# Altium PCB UTAT_data handling_v1.pc.PcbDoc (part 1 of 3)
Units mm, origin at the board's own origin, x right, y up, seen from the top; angles counter-clockwise.
Board outline 152.4 x 101.6 mm, 4 copper layers (Top Layer, +3V3, GND, Bottom Layer); 168 components, 207 nets, 753 pads, 464 vias.
Unrouted connection lines stored in the file: 1.
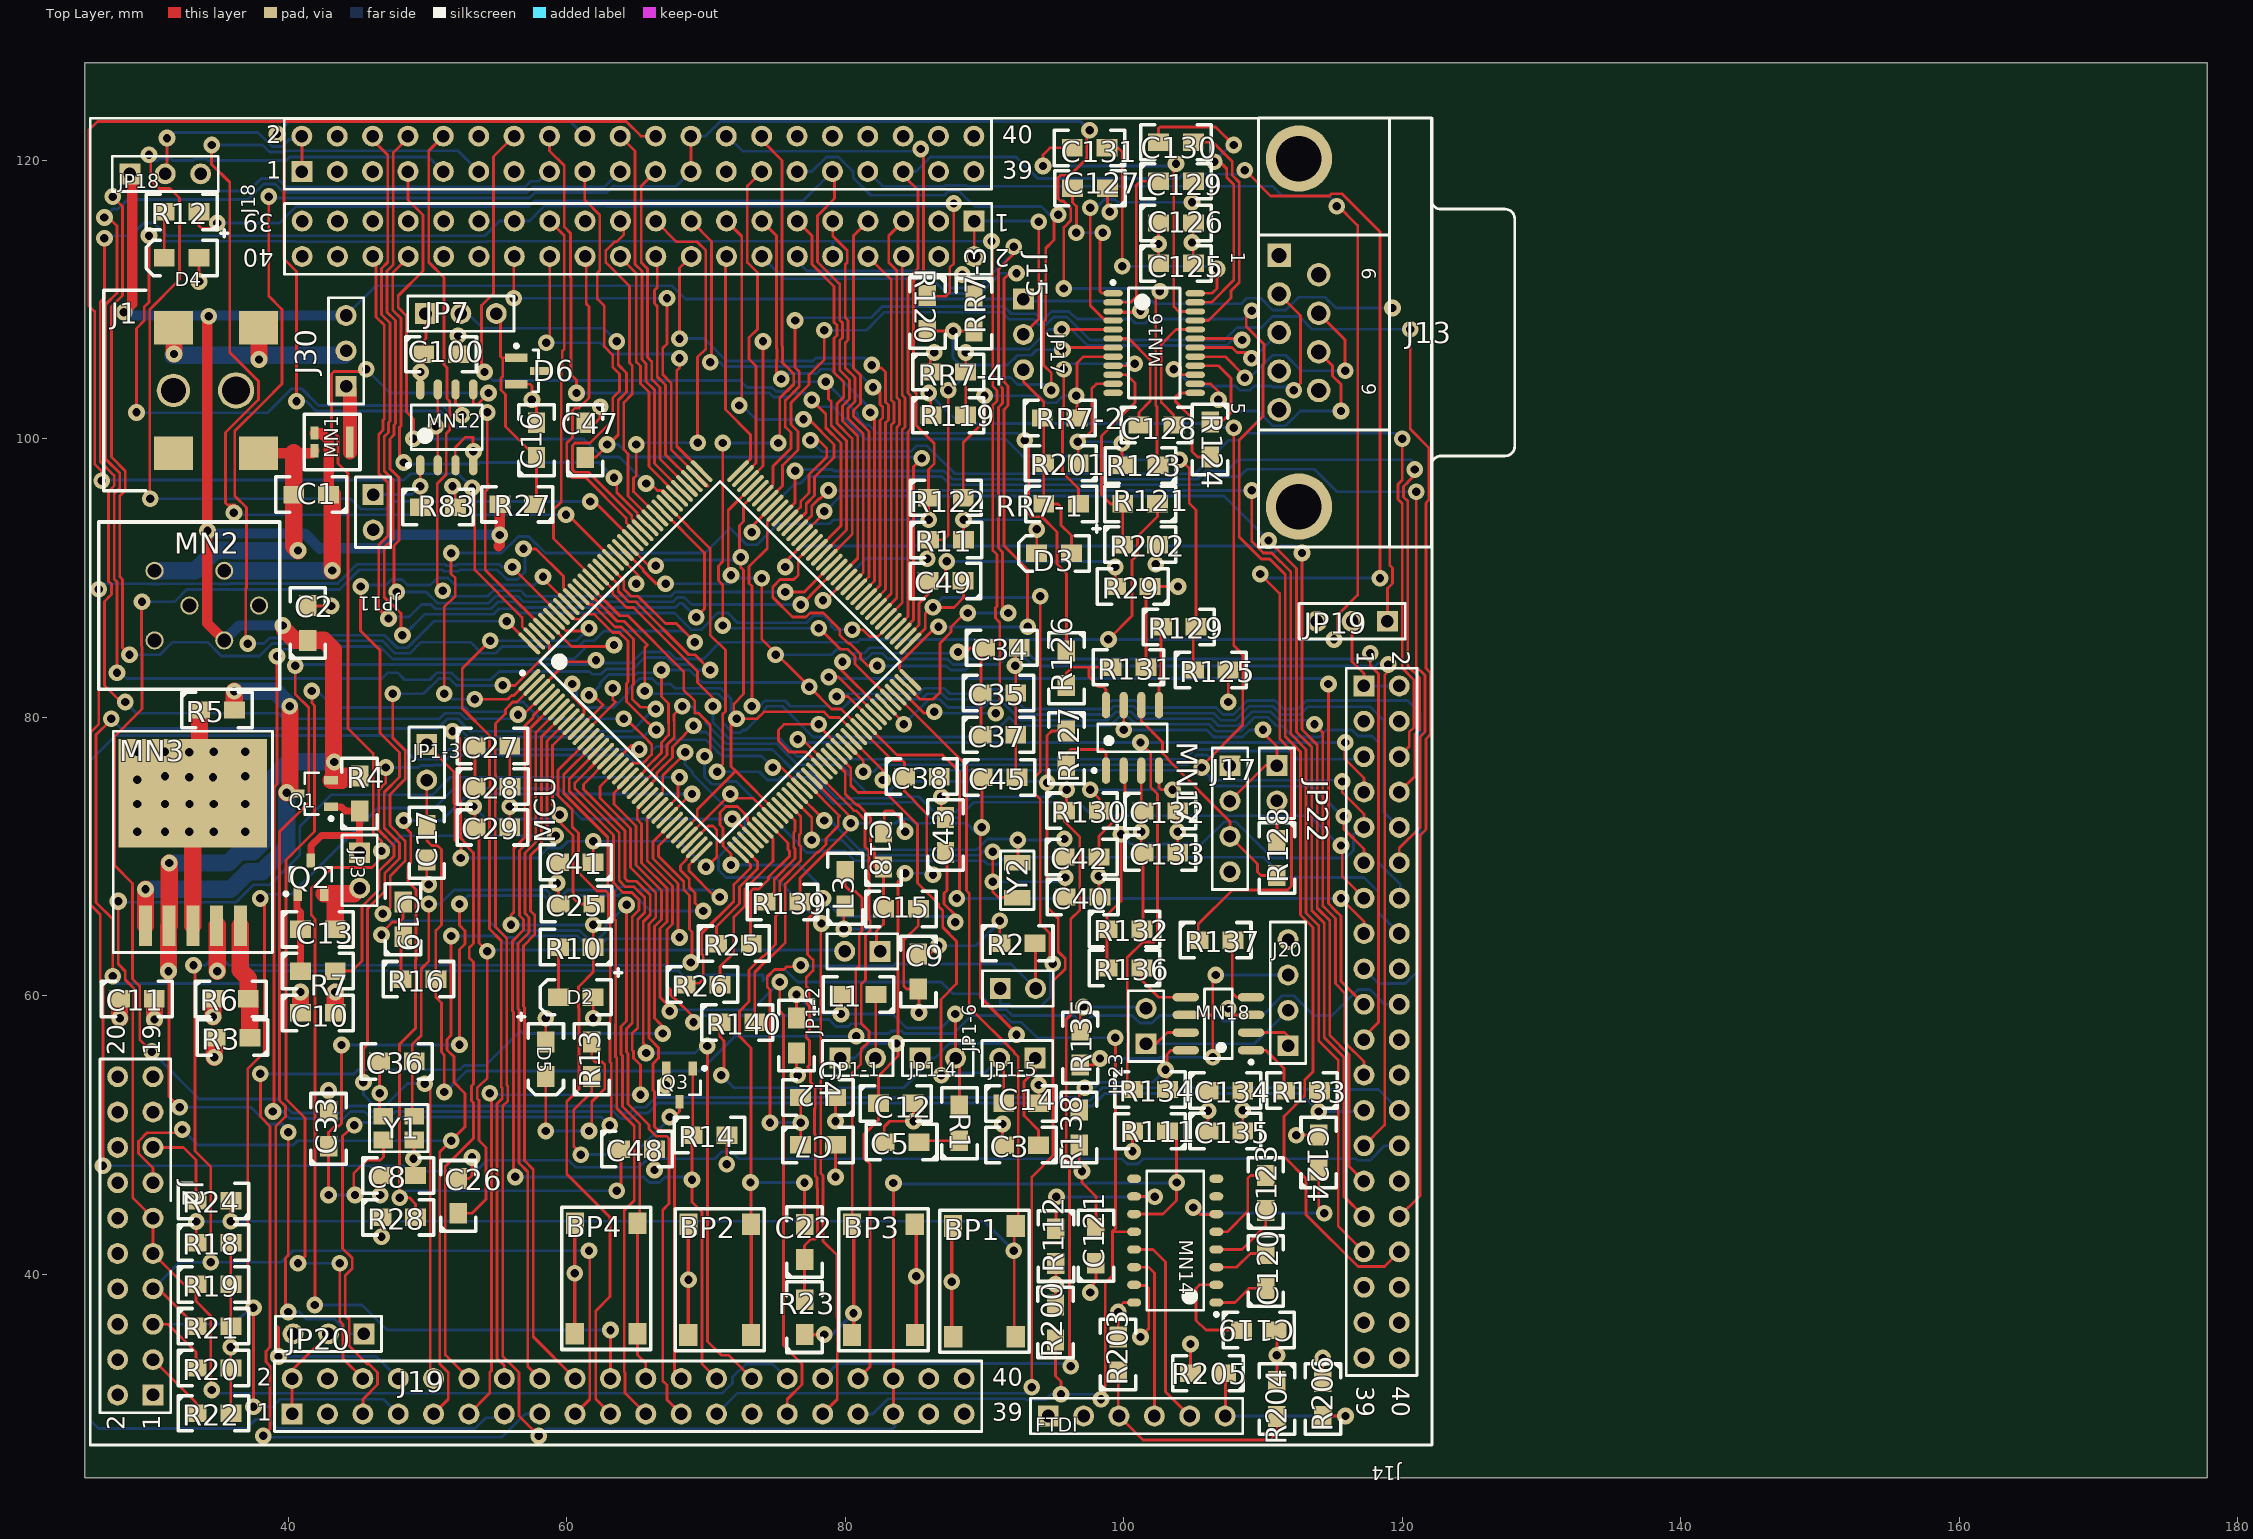
[diagram p0: Top Layer view]
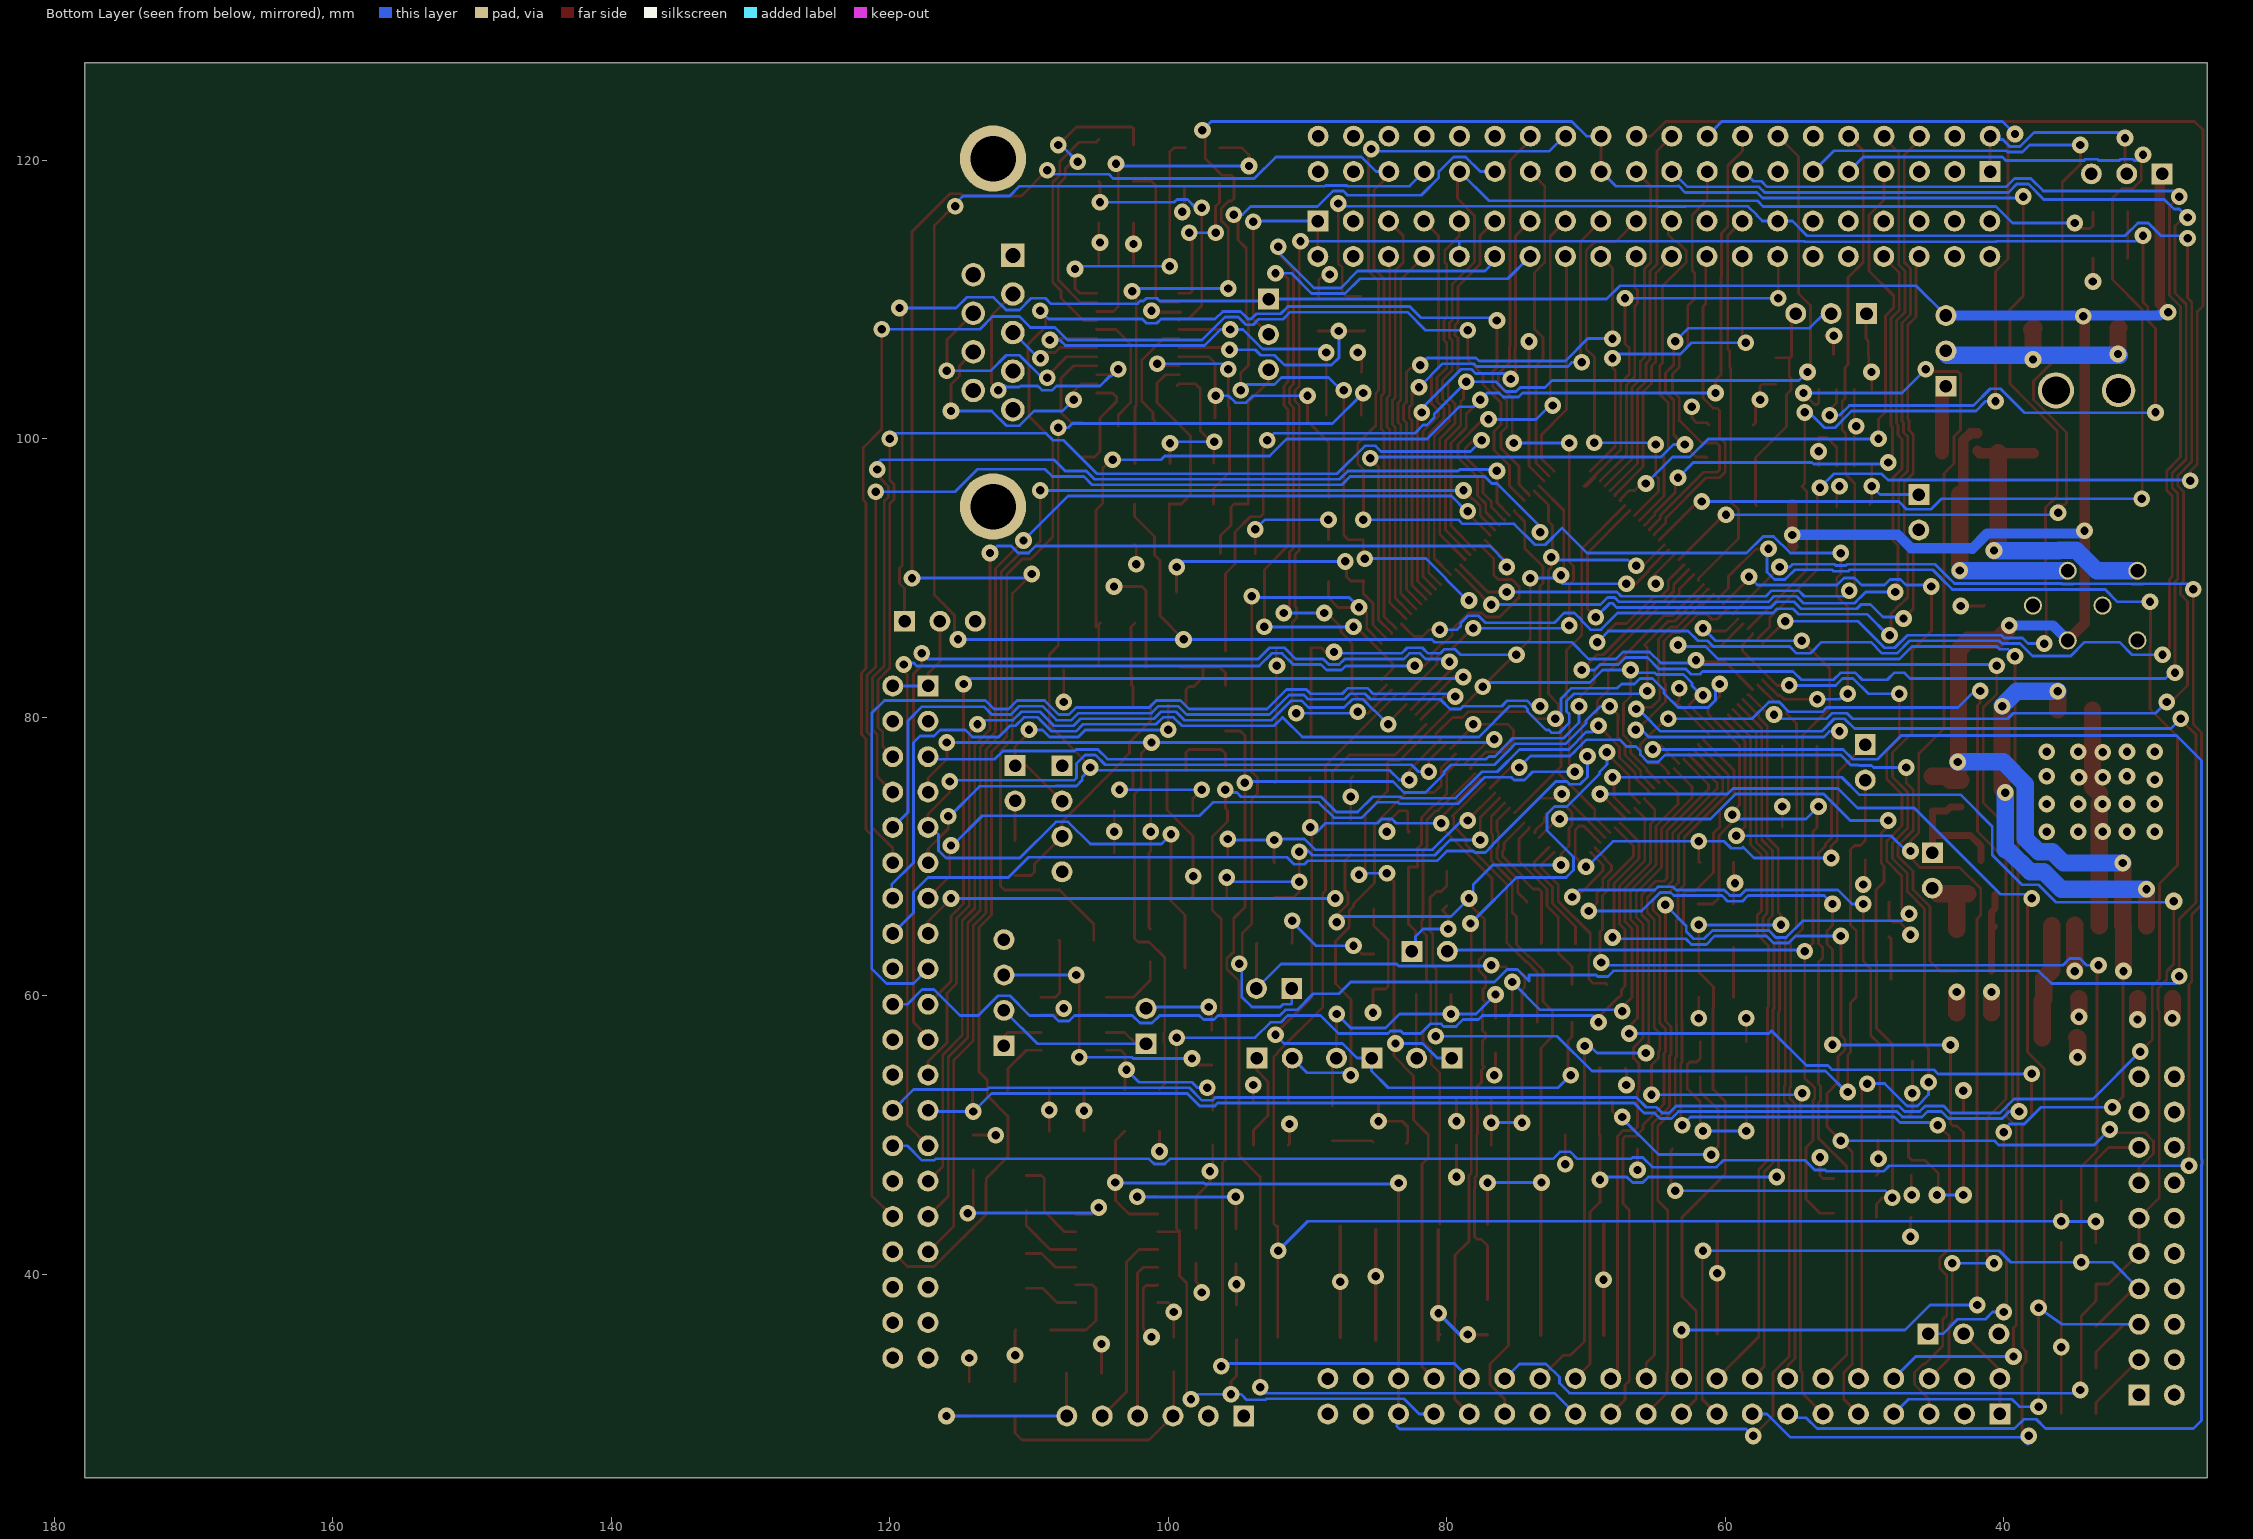
[diagram p1: Bottom Layer view, seen from below]
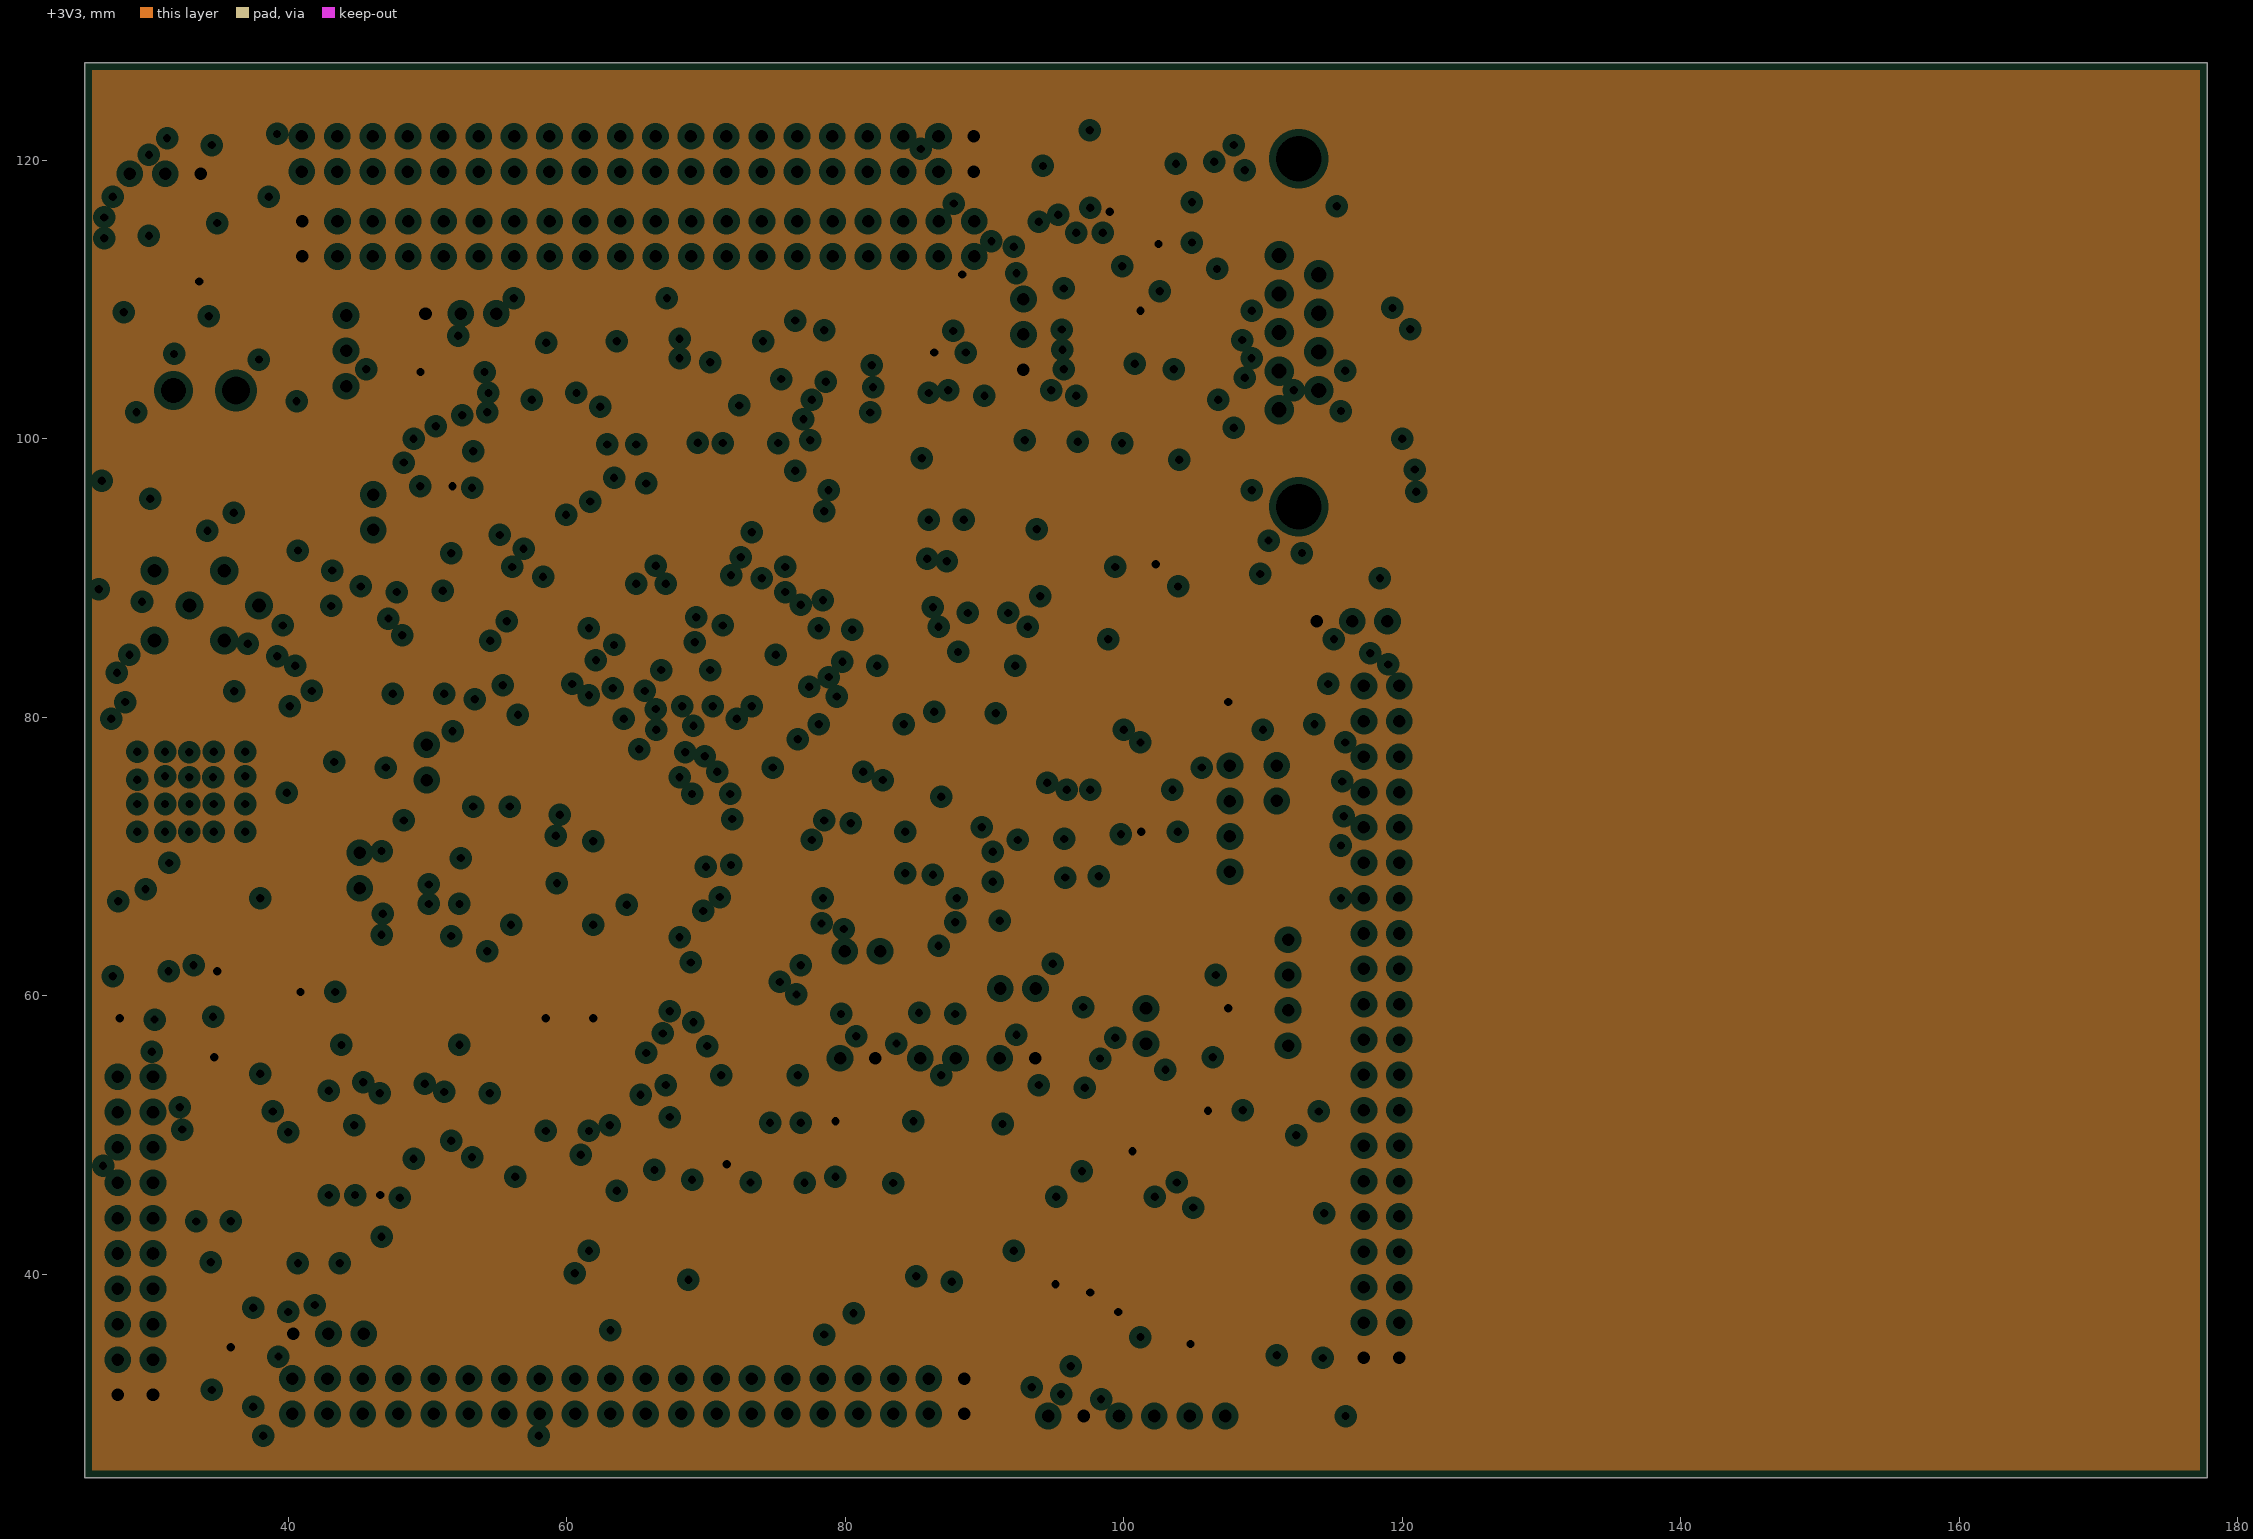
[diagram p2: +3V3, clearances drawn from the general rule]
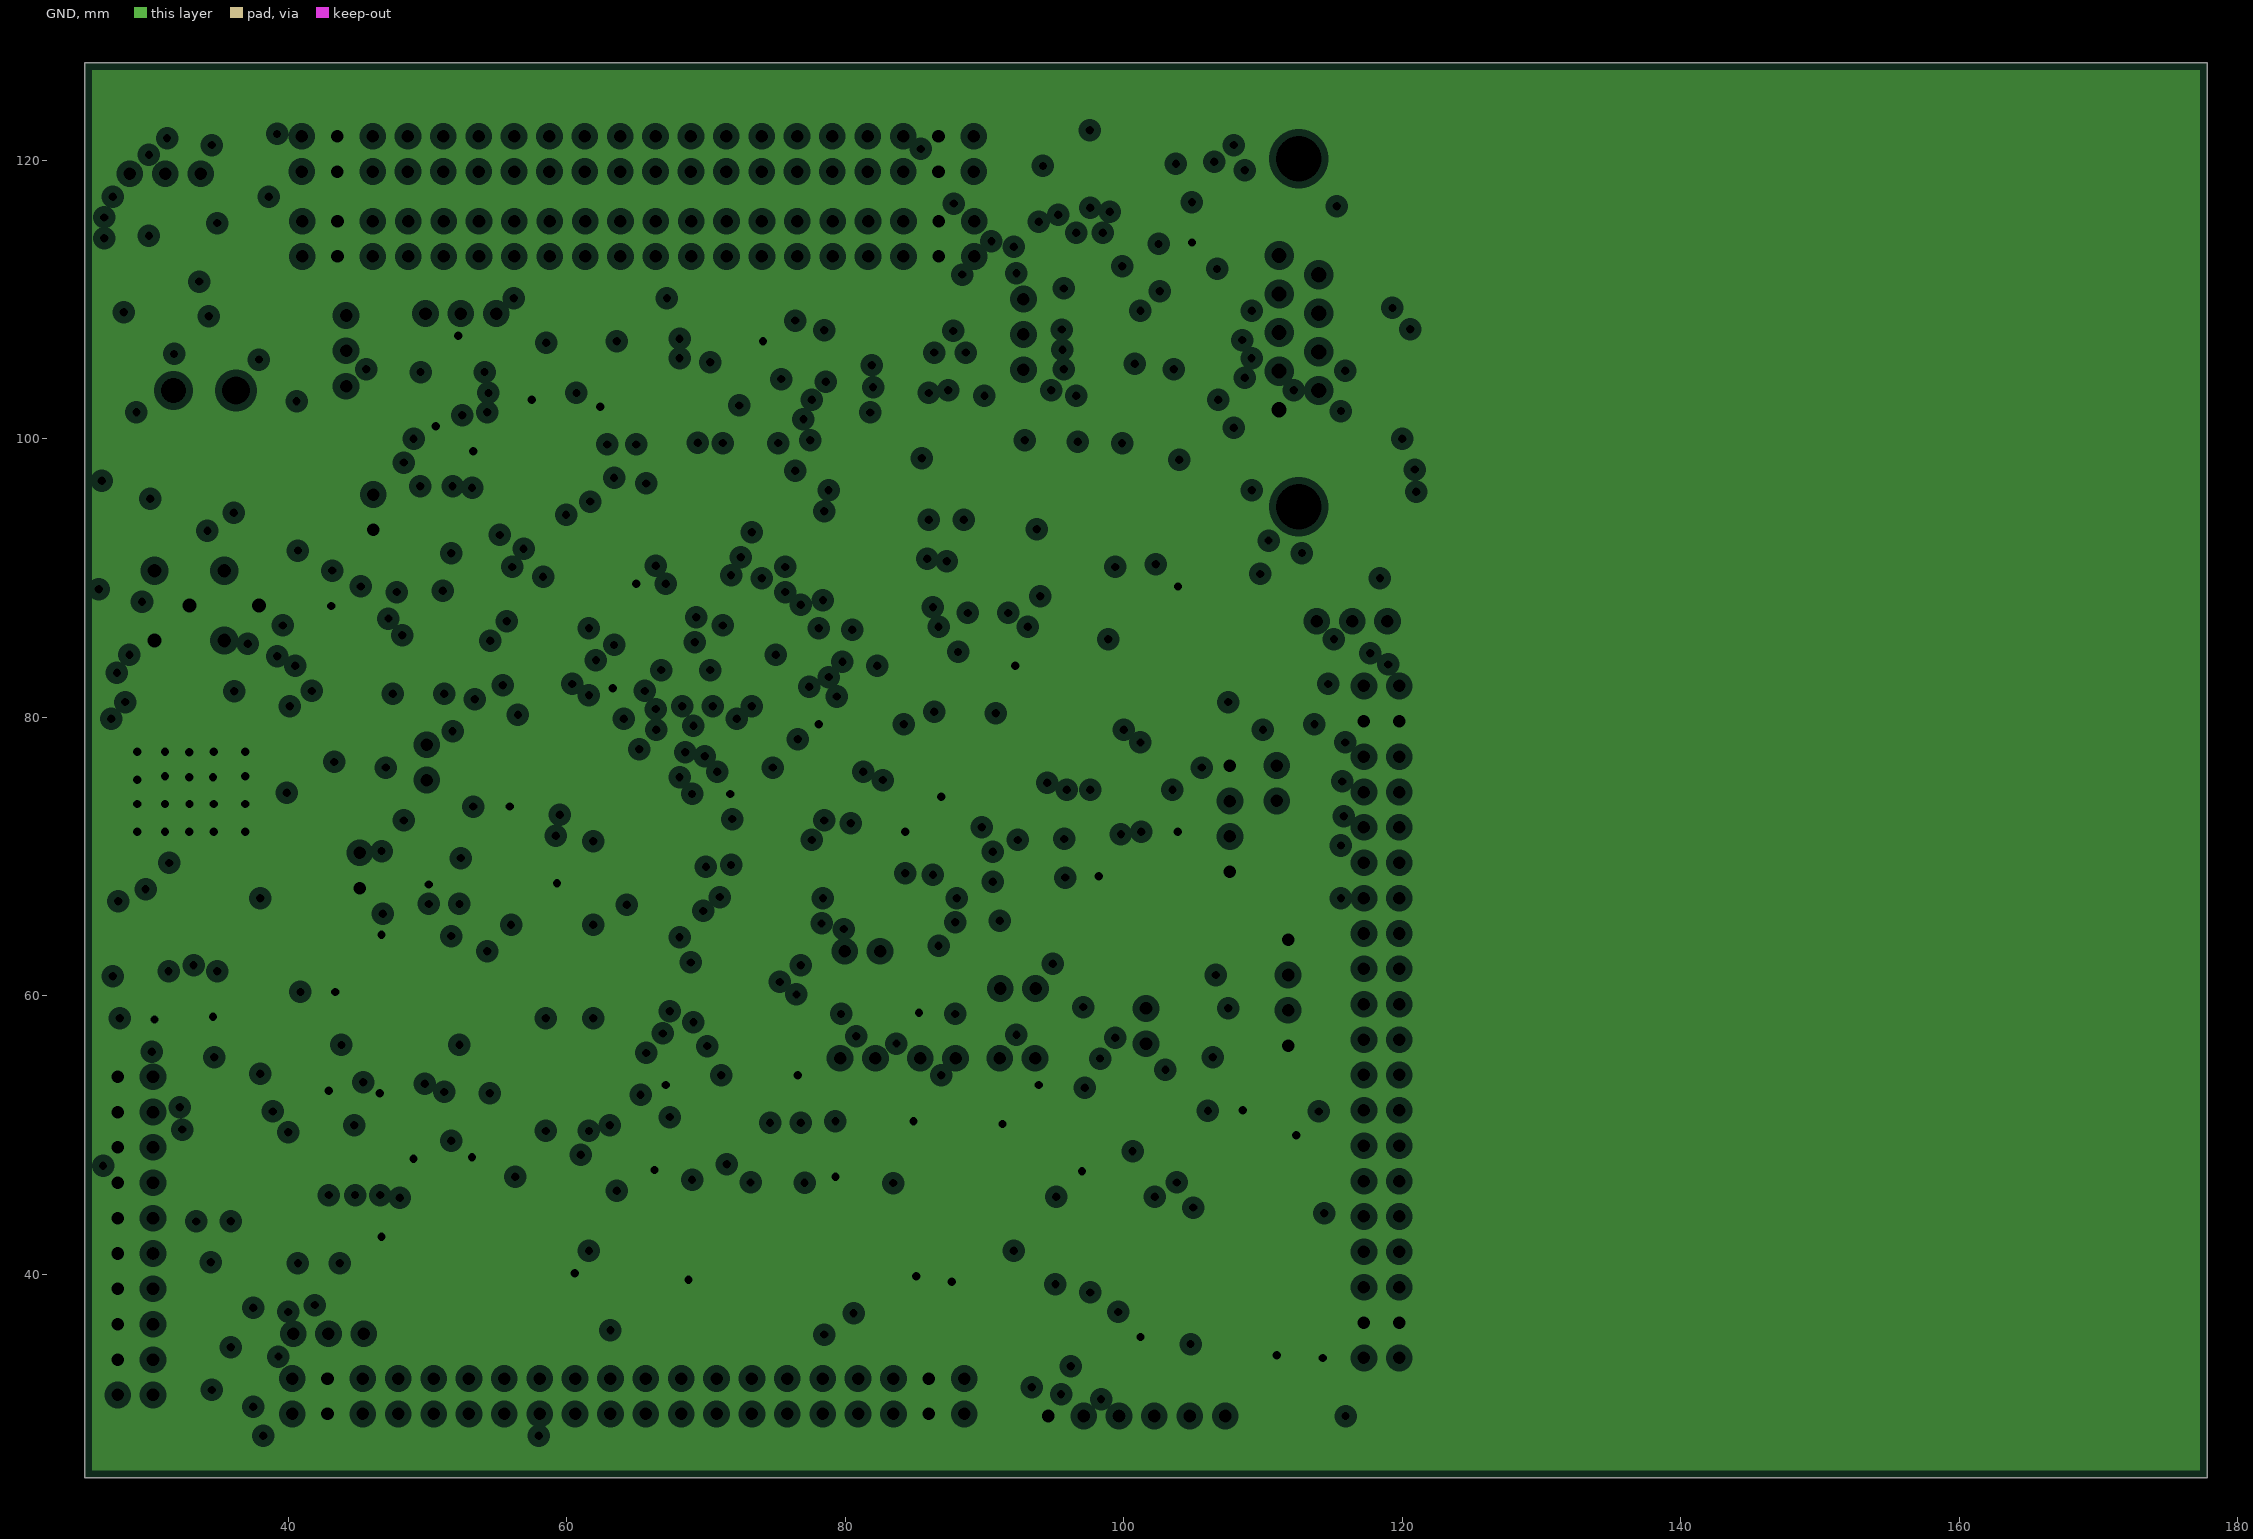
[diagram p3: GND, clearances drawn from the general rule]

## Layer stack, top to bottom
Top Solder: solder mask 0.0102, Solder Resist, Dk 3.5
Top Layer: signal copper 0.0356
Dielectric 1: dielectric 0.32, FR-4, Dk 4.8
+3V3: plane copper 0.0356, net +3V3
Dielectric2: dielectric 0.32, FR-4, Dk 4.8
GND: plane copper 0.0356, net GND
Dielectric3: dielectric 0.32, FR-4, Dk 4.8
Bottom Layer: signal copper 0.0356
Bottom Solder: solder mask 0.0102, Solder Resist, Dk 3.5

## Board outline
25.4,25.4 177.8,25.4 177.8,127 25.4,127

## Design rules (kind name [scope] priority, off if disabled: settings)
Clearance [All] p1: gap=0.2
PlaneClearance [All] p1: clearance=0.508
PlaneConnect [All] p1: planeconnectstyle=Relief reliefexpansion=0.508 reliefentries=4 reliefconductorwidth=0.254 reliefairgap=0.254
PolygonConnect [All] p1: connectstyle=Relief reliefconductorwidth=0.254 reliefentries=4 polygonreliefangle="90 Angle" airgapwidth=0.254
RoutingVias [All] p1: holewidth=0.6 width=1.2 viastyle="Through Hole" minholewidth=0.6 minwidth=1.2 maxholewidth=0.6 maxwidth=1.2
SolderMaskExpansion [All] p1: expansion=0.102
Width [All] p1: maxlimit=1.25 minlimit=0.2 preferedwidth=1.25
28 further rules are at their usual default settings.

## Classes and differential pairs
component class "U_Other Components": BP1 BP2 BP3 BP4 C1 C2 C3 C4 C5 C7 C8 C9 C10 C11 C12 C13 C14 C15 C17 C18 C19 C22 C100 C119 C120 C121 C123 C124 C125 C126 C127 C128 C129 C130 C131 D2 D3 D4 D5 FTDI J1 J13 J14 J15 J18 J19 J30 JP1-1 JP1-2 JP1-3 JP1-4 JP1-5 JP1-6 JP3 JP11 JP17 JP18 JP19 JP20 L1 L2 L3 MN1 MN2 MN3 MN12 MN14 MN16 Q1 Q2 Q3 R1 R2 R3 R4 R5 R6 R7 R10 R11 R12 R13 R14 R16 R23 R83 R111 R112 R119 R120 R121 R122 R123 R124 R200 R201 R202 R203 R204 R205 R206 RR7-1 RR7-2 RR7-3 RR7-4
component class "U_MCU et al": C25 C26 C27 C28 C29 C33 C34 C35 C36 C37 C38 C40 C41 C42 C43 C45 C47 C48 C49 C132 C133 C134 C135 D6 J2 J17 J20 JP7 JP22 JP23 MCU MN17 MN18 R18 R19 R20 R21 R22 R24 R25 R26 R27 R28 R29 R125 R126 R127 R128 R129 R130 R131 R132 R133 R134 R135 R136 R137 R138 R139 R140 Y1 Y2
net class PD[0..10]: PD0 PD1 PD2 PD3 PD4 PD5 PD6 PD7 PD8 PD9 PD10
net class PC[0..30]: PC0 PC1 PC2 PC3 PC4 PC5 PC6 PC7 PC8 PC9 PC10 PC11 PC12 PC13 PC14 PC15 PC16 PC17 PC18 PC19 PC20 PC21 PC22 PC23 PC24 PC25 PC26 PC27 PC28 PC29 PC30
net class PB[0..31]: PB0 PB1 PB2 PB3 PB4 PB5 PB6 PB7 PB8 PB9 PB10 PB11 PB12 PB13 PB14 PB15 PB16 PB17 PB18 PB19 PB20 PB21 PB22 PB23 PB24 PB25 PB26 PB27 PB28 PB29 PB30 PB31
net class PA[0..29]: PA0 PA1 PA2 PA3 PA4 PA5 PA6 PA7 PA8 PA9 PA10 PA11 PA12 PA13 PA14 PA15 PA16 PA17 PA18 PA19 PA20 PA21 PA22 PA23 PA24 PA25 PA26 PA27 PA28 PA29

## Components (designator, comment, footprint, x,y, rotation, side; value= is the part's Value field where it differs from the comment)
BP1 "PTS645" PTS645 90,39.5 r90 top
BP2 "PTS645" PTS645 70.994,39.62 r90 top
BP3 "PTS645" PTS645 82.748,39.62 r270 top
BP4 "PTS645" PTS645 62.831,39.705 r90 top
C1 "Cap Pol3" "0805 Cap" 41.65,96 r0 top
C2 "Cap Pol3" "0805 Cap" 41.406,86.78 r270 top
C3 "Cap Pol3" "0805 Cap" 92.631,49.28 r0 top
C4 "Cap Pol3" "0805 Cap" 76.5,57.15 r90 top
C5 "Cap Pol3" "0805 Cap" 84.05,49.5 r0 top
C7 "Cap Pol3" "0805 Cap" 78.05,49.3 r180 top
C8 "Cap Pol3" "0805 Cap" 47.9,47.1 r180 top
C9 "Cap Pol3" "0805 Cap" 85.25,61.75 r90 top
C10 "Cap Pol3" "0805 Cap" 42.131,58.78 r180 top
C11 "Cap Pol3" "0805 Cap" 29.131,59.78 r180 top
C12 "Cap Pol3" "0805 Cap" 83.631,52.28 r180 top
C13 "Cap Pol3" "0805 Cap" 42.131,64.78 r180 top
C14 "Cap Pol3" "0805 Cap" 92.631,52.28 r180 top
C15 "Cap Pol3" "0805 Cap" 84,66.25 r180 top
C16 "Cap Pol3" "0805 Cap" 57.831,99.905 r270 top
C17 "Cap Pol3" "0805 Cap" 49.95,71 r90 top
C18 "Cap Pol3" "0805 Cap" 82.75,70.5 r270 top
C19 "Cap Pol3" "0805 Cap" 48.25,65.5 r270 top
C22 "Cap Pol3" "0805 Cap" 77.081,42.33 r270 top
C25 "Cap Pol3" "0805 Cap" 60.7,66.6 r0 top
C26 "Cap Pol3" "0805 Cap" 52.209,45.638 r270 top
C27 "Cap Pol3" "0805 Cap" 54.663,77.947 r180 top
C28 "Cap Pol3" "0805 Cap" 54.683,75.026 r180 top
C29 "Cap Pol3" "0805 Cap" 54.663,72.105 r180 top
C33 "0805 Cap" "0805 Cap" 42.9,50.45 r270 top
C34 "Cap Pol3" "0805 Cap" 91.25,85 r180 top
C35 "Cap Pol3" "0805 Cap" 91,81.75 r180 top
C36 "0805 Cap" "0805 Cap" 47.8,55.3 r0 top
C37 "Cap Pol3" "0805 Cap" 91,78.75 r180 top
C38 "Cap Pol3" "0805 Cap" 85.5,75.75 r180 top
C40 "0805 Cap" "0805 Cap" 97.05,67.1 r180 top
C41 "Cap Pol3" "0805 Cap" 60.65,69.6 r0 top
C42 "0805 Cap" "0805 Cap" 96.981,69.972 r180 top
C43 "Cap Pol3" "0805 Cap" 87.2,71.55 r270 top
C45 "Cap Pol3" "0805 Cap" 91.082,75.692 r180 top
C47 "Cap Pol3" "0805 Cap" 61.331,99.905 r270 top
C48 "Cap Pol3" "0805 Cap" 65.05,49 r180 top
C49 "Cap Pol3" "0805 Cap" 87.2,89.8 r0 top
C100 "Cap Pol3" "0805 Cap" 50.981,106.08 r180 top
C119 "Cap Pol3" "0805 Cap" 109.7,36 r180 top
C120 "Cap Pol3" "0805 Cap" 110.2,40.25 r270 top
C121 "Cap Pol3" "0805 Cap" 98,42.05 r270 top
C123 "Cap Pol3" "0805 Cap" 110.2,45.85 r270 top
C124 "Cap Pol3" "0805 Cap" 114,48.75 r270 top
C125 "Cap Pol3" "0805 Cap" 103.75,112.6 r180 top
C126 "Cap Pol3" "0805 Cap" 103.75,115.5 r180 top
C127 "Cap Pol3" "0805 Cap" 97.581,118 r0 top
C128 "Cap Pol3" "0805 Cap" 102.35,101 r180 top
C129 "Cap Pol3" "0805 Cap" 103.75,118.5 r180 top
C130 "Cap Pol3" "0805 Cap" 103.75,121.3 r0 top
C131 "Cap Pol3" "0805 Cap" 97.55,120.9 r0 top
C132 "Cap Pol3" "0805 Cap" 102.631,73.28 r180 top
C133 "Cap Pol3" "0805 Cap" 102.631,70.28 r180 top
C134 "Cap Pol3" "0805 Cap" 107.3,53.2 r180 top
C135 "Cap Pol3" "0805 Cap" 107.3,50.3 r180 top
D2 "Blue" "0805 LED" 60.65,59.9 r0 top
D3 "Amber" "0805 LED" 94.999,91.774 r0 top
D4 "Green" "0805 LED" 32.35,113 r0 top
D5 "Red" "0805 LED" 58.5,55.45 r90 top
D6 "LM4040A30IDBZR" TI-DBZ3_N 57.281,104.88 r0 top
FTDI "Header 6" HDR1X6 94.581,29.83 r0 top
J1 "MP179P 2.1mm" "2.1mm Jack" 31.756,103.48 r0 top
J2 "Header 10X2" "HDR2X10 (JTAG)" 30.29,31.34 r90 top
J13 "D Connector 9" DSUB1.385-2H9 122.08,107.635 r270 top
J14 "Header 20X2" HDR2X20 117.25,82.26 r270 top
J15 "Header 20X2" HDR2X20 89.26,115.64 r180 top
J17 "Header 4" HDR1X4 107.631,76.53 r270 top
J18 "Header 20X2" HDR2X20 40.98,119.2 r0 top
J19 "Header 20X2" HDR2X20 40.281,29.98 r0 top
J20 "Header 4" HDR1X4 111.8,56.42 r90 top
J30 "Header 3 (Bypass)" HDR1X3 44.156,103.78 r90 top
JP1-1 "Header 2" HDR1X2 79.631,55.53 r0 top
JP1-2 "Header 2" HDR1X2 82.5,63.2 r180 top
JP1-3 "Header 2" HDR1X2 49.95,78.04 r270 top
JP1-4 "Header 2" HDR1X2 85.381,55.53 r0 top
JP1-5 "Header 2" HDR1X2 93.631,55.53 r180 top
JP1-6 "Header 2" HDR1X2 91.131,60.53 r0 top
JP3 "Header 2" HDR1X2 45.131,70.28 r270 top
JP7 "Header 3" HDR1X3 49.86,109 r0 top
JP11 "Header 2" HDR1X2 46.1,96 r270 top
JP17 "Header 3" HDR1X3 92.8,110.04 r270 top
JP18 "Header 3" HDR1X3 28.631,119.03 r0 top
JP19 "Header 3" HDR1X3 118.94,86.9 r180 top
JP20 "Header 3" HDR1X3 45.431,35.73 r180 top
JP22 "Header 2" HDR1X2 111,76.54 r270 top
JP23 "Header 2" HDR1X2 101.6,56.56 r90 top
L1 "Inductor" "0805 Resistor" 80.95,60.1 r0 top
L2 "Inductor" "0805 Resistor" 78.05,52.7 r0 top
L3 "Inductor" "0805 Resistor" 80,67.7 r270 top
MCU "ATSAM3X8EA-AU" LQFP144_M 71,84 r45 top
MN1 "ZEN056V130A" ZEN056V130A24L 43.156,99.78 r180 top
MN2 "BNX002-01" BNX002 32.906,88.03 r0 top
MN3 "MIC29152WU" MIC29152WU 33.156,65.03 r0 top
MN12 "AT24C512C" AT24C512C 51.381,100.83 r90 top
MN14 "MAX3232CSE" SOIC127P570X175-16N 103.7,42.425 r180 top
MN16 "ADM3312EARU" TSOP65P640X120-24N 102.185,106.88 r0 top
MN17 "SN65HVD234DR" D8_L 100.631,78.53 r90 top
MN18 "SN65HVD234DR" D8_L 106.8,58 r180 top
Q1 "IRLML6401" "3 Pin SOT-23" 41.881,74.53 r180 top
Q2 "IRLML2502" "3 Pin SOT-23" 41.631,68.53 r90 top
Q3 "IRLML2502" "3 Pin SOT-23" 68.1,53.6 r270 top
R1 "0805 Resistor" "0805 Resistor" 88.2,50.85 r270 top
R2 "0805 Resistor" "0805 Resistor" 92.381,63.78 r180 top
R3 "0805 Resistor" "0805 Resistor" 36,57 r0 top
R4 "0805 Resistor" "0805 Resistor" 45.131,74.53 r270 top
R5 "0805 Resistor" "0805 Resistor" 34.881,80.53 r180 top
R6 "0805 Resistor" "0805 Resistor" 35.881,59.78 r180 top
R7 "0805 Resistor" "0805 Resistor" 42.131,61.78 r180 top
R10 "0805 Resistor" "0805 Resistor" 60.65,63.5 r0 top
R11 "0805 Resistor" "0805 Resistor" 87.25,92.75 r180 top
R12 "0805 Resistor" "0805 Resistor" 32.35,116.3 r0 top
R13 "0805 Resistor" "0805 Resistor" 61.8,55.45 r270 top
R14 "0805 Resistor" "0805 Resistor" 70.25,50 r180 top
R16 "0805 Resistor" "0805 Resistor" 49.35,61.2 r180 top
R18 "0805 Resistor" "0805 Resistor" 34.631,42.28 r180 top
R19 "0805 Resistor" "0805 Resistor" 34.631,39.28 r180 top
R20 "0805 Resistor" "0805 Resistor" 34.631,33.28 r180 top
R21 "0805 Resistor" "0805 Resistor" 34.631,36.28 r180 top
R22 "0805 Resistor" "0805 Resistor" 34.631,30.03 r180 top
R23 "0805 Resistor" "0805 Resistor" 77.081,36.93 r270 top
R24 "0805 Resistor" "0805 Resistor" 34.631,45.28 r0 top
R25 "0805 Resistor" "0805 Resistor" 72,63.75 r180 top
R26 "0805 Resistor" "0805 Resistor" 69.755,60.814 r180 top
R27 "0805 Resistor" "0805 Resistor" 56.45,95.3 r0 top
R28 "0805 Resistor" "0805 Resistor" 47.9,44.1 r180 top
R29 "0805 Resistor" "0805 Resistor" 100.65,89.4 r0 top
R83 "0805 Resistor" "0805 Resistor" 50.75,95.1 r180 top
R111 "0805 Resistor" "0805 Resistor" 101.881,50.28 r0 top
R112 "0805 Resistor" "0805 Resistor" 95.131,42.03 r90 top
R119 "0805 Resistor" "0805 Resistor" 87.4,101.7 r180 top
R120 "0805 Resistor" "0805 Resistor" 85.9,109.05 r90 top
R121 "0805 Resistor" "0805 Resistor" 101.182,95.33 r0 top
R122 "0805 Resistor" "0805 Resistor" 87.228,95.776 r180 top
R123 "0805 Resistor" "0805 Resistor" 101.2,98.1 r0 top
R124 "0805 Resistor" "0805 Resistor" 106.2,99.95 r90 top
R125 "0805 Resistor" "0805 Resistor" 106.25,83.4 r180 top
R126 "0805 Resistor" "0805 Resistor" 95.881,83.53 r90 top
R127 "0805 Resistor" "0805 Resistor" 95.881,77.78 r90 top
R128 "0805 Resistor" "0805 Resistor" 111,69.9 r90 top
R129 "0805 Resistor" "0805 Resistor" 103.95,86.5 r180 top
R130 "0805 Resistor" "0805 Resistor" 97,73.3 r180 top
R131 "0805 Resistor" "0805 Resistor" 100.35,83.6 r0 top
R132 "0805 Resistor" "0805 Resistor" 100.05,64.8 r180 top
R133 "0805 Resistor" "0805 Resistor" 112.8,53.2 r0 top
R134 "0805 Resistor" "0805 Resistor" 101.881,53.28 r180 top
R135 "0805 Resistor" "0805 Resistor" 96.881,56.28 r90 top
R136 "0805 Resistor" "0805 Resistor" 100.05,62 r0 top
R137 "0805 Resistor" "0805 Resistor" 106.6,64 r180 top
R138 "0805 Resistor" "0805 Resistor" 96.8,50.55 r270 top
R139 "0805 Resistor" "0805 Resistor" 75.5,66.75 r0 top
R140 "0805 Resistor" "0805 Resistor" 72.25,58.1 r180 top
R200 "0805 Resistor" "0805 Resistor" 95.1,36.55 r270 top
R201 "0805 Resistor" "0805 Resistor" 95.487,98.251 r0 top
R202 "0805 Resistor" "0805 Resistor" 101.182,92.409 r180 top
R203 "0805 Resistor" "0805 Resistor" 99.6,34.25 r270 top
R204 "0805 Resistor" "0805 Resistor" 111,31.05 r90 top
R205 "0805 Resistor" "0805 Resistor" 106.05,32.9 r0 top
R206 "0805 Resistor" "0805 Resistor" 114.3,31.05 r90 top
RR7-1 "0805 Resistor" "0805 Resistor" 95.507,95.33 r180 top
RR7-2 "0805 Resistor" "0805 Resistor" 95.4,101.5 r180 top
RR7-3 "0805 Resistor" "0805 Resistor" 89.25,109 r90 top
RR7-4 "0805 Resistor" "0805 Resistor" 87.4,104.8 r180 top
Y1 "12MHz" 7V-12.000MAAE-T 47.934,50.503 r180 top
Y2 "XTAL" ABS07 92.352,68.306 r90 top

## Footprints (in the part's own frame and the unit in brackets; to place one, negate y for a bottom-side part, rotate by r counter-clockwise, add the part's x,y. Pads: shape width x height; smd on the part's side, far side on the other; paste and mask are expansions set on the pad)
"2.1mm Jack" [mm]
  rect 2.8x2.4 smd: 1(0,4.5) 1(6.1,4.5) 2(0,-4.5) 3(6.1,-4.5)
  round 2.4 hole 1.8: ""(0,0)
  round 2.6 hole 2: ""(4.5,0)
  silkscreen extent -5,-7.2 -2,7.2
"3 Pin SOT-23" [mm] "SOT23, 3-Leads, Body 2.92x2.37mm, Pitch 0.95mm, IPC Medium Density;"
  rect 1x0.6 smd: 1(-1.2,0.95) 2(-1.2,-0.95) 3(1.2,0)
  silkscreen extent -1.33,-1.5 0.7,1.92, body extent -0.7,-1.52 0.7,1.52, height 1.12
7V-12.000MAAE-T [mm] "Crystal Oscillator. DIgikey Number: 887-1458-1-ND"
  rect 1.4x1.2 smd: 1(-1.1,-0.85) 2(1.1,-0.85) 3(1.1,0.85) 4(-1.1,0.85)
  round 0.6 on Top Overlay: 5(-2.54,-0.889)
  silkscreen extent -2.1,-1.7 2.1,1.7
"0805 Cap" [mm]
  rect 1.5x1.25 smd: 1(1.25,0) 2(-1.25,0)
  silkscreen extent -2.54,-1.27 2.54,1.27, body extent -1,-0.63 1.1,0.63, height 0.9
"0805 LED" [mm] "0805 LED"
  rect 1.5x1.25 smd: 1(1.25,0) 2(-1.25,0)
  silkscreen extent -2.54,-1.27 3.3,2.03, body extent -1,-0.63 1.1,0.63, height 0.9
"0805 Resistor" [mm]
  rect 1.5x1.25 smd: 1(1.25,0) 2(-1.25,0)
  silkscreen extent -2.54,-1.27 2.54,1.27, body extent -1,-0.63 1.1,0.63, height 0.6
ABS07 [mm]
  rect 1.1x1.9 smd: 1(-1.25,0) 2(1.25,0)
  silkscreen extent -2.1,-1.2 2.1,1.2
AT24C512C [mm] "SOIC, 8-Leads, Body 4.92x3.90mm, Pitch 1.27mm, IPC Medium Density"
  oval 1.45x0.6 smd: 1(-2.725,1.905) 2(-2.725,0.635) 3(-2.725,-0.635) 4(-2.725,-1.905) 5(2.725,-1.905) 6(2.725,-0.635) 7(2.725,0.635) 8(2.725,1.905)
  silkscreen extent -2.85,-2.55 1.6,2.88, body extent -2,-2.55 2,2.55, height 1.75
BNX002 [mm]
  round 1.3 hole 1: 1(2.5,2.5) 2(-2.5,2.5) 3(2.5,-2.5) 4(0,0) 5(5,0) 6(-2.5,-2.5)
  silkscreen extent -6.5,-6 6.5,6
D8_L [mm] "SOIC, 8-Leads, Body 4.9x3.9mm, Pitch 1.27mm, IPC High Density"
  oval 1.9x0.6 smd: 1(-2.35,1.905) 2(-2.35,0.635) 3(-2.35,-0.635) 4(-2.35,-1.905) 5(2.35,-1.905) 6(2.35,-0.635) 7(2.35,0.635) 8(2.35,1.905)
  silkscreen extent -2.47,-2.5 1,2.88, body extent -2,-2.5 2,2.5, height 1.75
DSUB1.385-2H9 [mm]
  rect 1.69x1.69 hole 1.09: 1(-5.54,-10.92)
  round 1.69 hole 1.09: 2(-2.77,-10.92) 3(0,-10.92) 4(2.77,-10.92) 5(5.54,-10.92) 6(-4.155,-8.08) 7(-1.385,-8.08) 8(1.385,-8.08) 9(4.155,-8.08)
  round 4.76 hole 3.26: 10(-12.495,-9.5) 11(12.495,-9.5)
  silkscreen extent -15.4,-12.4 15.4,6
HDR1X2 [mm]
  rect 1.5x1.5 hole 0.9: 1(0,0)
  round 1.5 hole 0.9: 2(2.54,0)
  silkscreen extent -1.27,-1.27 3.81,1.27
HDR1X3 [mm] "Connector; Header; 3 Position"
  rect 1.5x1.5 hole 0.9: 1(0,0)
  round 1.5 hole 0.9: 2(2.54,0) 3(5.08,0)
  silkscreen extent -1.27,-1.27 6.35,1.27
HDR1X4 [mm] "Connector; Header; 4 Position"
  rect 1.5x1.5 hole 0.9: 1(0,0)
  round 1.5 hole 0.9: 2(2.54,0) 3(5.08,0) 4(7.62,0)
  silkscreen extent -1.27,-1.27 8.89,1.27
HDR1X6 [mm] "Connector; Header; 6 Position"
  rect 1.5x1.5 hole 0.9: 1(0,0)
  round 1.5 hole 0.9: 2(2.54,0) 3(5.08,0) 4(7.62,0) 5(10.16,0) 6(12.7,0)
  silkscreen extent -1.27,-1.27 13.97,1.27
"HDR2X10 (JTAG)" [mm] "Connector; Header; 10x2 Position"
  rect 1.5x1.5 hole 0.9: 1(0,0)
  round 1.5 hole 0.9: 2(0,2.54) 3(2.54,0) 4(2.54,2.54) 5(5.08,0) 6(5.08,2.54) 7(7.62,0) 8(7.62,2.54) 9(10.16,0) 10(10.16,2.54) 11(12.7,0) 12(12.7,2.54) 13(15.24,0) 14(15.24,2.54) 15(17.78,0) 16(17.78,2.54) 17(20.32,0) 18(20.32,2.54) 19(22.86,0) 20(22.86,2.54)
  silkscreen extent -1.27,-1.27 24.13,3.81
HDR2X20 [mm] "Connector; Header; 20x2 Position"
  rect 1.5x1.5 hole 0.9: 1(0,0)
  round 1.5 hole 0.9: 2(0,2.54) 3(2.54,0) 4(2.54,2.54) 5(5.08,0) 6(5.08,2.54) 7(7.62,0) 8(7.62,2.54) 9(10.16,0) 10(10.16,2.54) 11(12.7,0) 12(12.7,2.54) 13(15.24,0) 14(15.24,2.54) 15(17.78,0) 16(17.78,2.54) 17(20.32,0) 18(20.32,2.54) 19(22.86,0) 20(22.86,2.54) 21(25.4,0) 22(25.4,2.54) 23(27.94,0) 24(27.94,2.54) 25(30.48,0) 26(30.48,2.54) 27(33.02,0) 28(33.02,2.54) 29(35.56,0) 30(35.56,2.54) 31(38.1,0) 32(38.1,2.54) 33(40.64,0) 34(40.64,2.54) 35(43.18,0) 36(43.18,2.54) 37(45.72,0) 38(45.72,2.54) 39(48.26,0) 40(48.26,2.54)
  silkscreen extent -1.27,-1.27 49.53,3.81
LQFP144_M [mm] "Thin QFP, 144-Leads, Body 20x20mm, Pitch 0.5mm, IPC Low Density"
  oval 2.1x0.3 smd: 1(-10.6,8.75) 2(-10.6,8.25) 3(-10.6,7.75) 4(-10.6,7.25) 5(-10.6,6.75) 6(-10.6,6.25) 7(-10.6,5.75) 8(-10.6,5.25) 9(-10.6,4.75) 10(-10.6,4.25) 11(-10.6,3.75) 12(-10.6,3.25) 13(-10.6,2.75) 14(-10.6,2.25) 15(-10.6,1.75) 16(-10.6,1.25) 17(-10.6,0.75) 18(-10.6,0.25) 19(-10.6,-0.25) 20(-10.6,-0.75) 21(-10.6,-1.25) 22(-10.6,-1.75) 23(-10.6,-2.25) 24(-10.6,-2.75) 25(-10.6,-3.25) 26(-10.6,-3.75) 27(-10.6,-4.25) 28(-10.6,-4.75) 29(-10.6,-5.25) 30(-10.6,-5.75) 31(-10.6,-6.25) 32(-10.6,-6.75) 33(-10.6,-7.25) 34(-10.6,-7.75) 35(-10.6,-8.25) 36(-10.6,-8.75) 73(10.6,-8.75) 74(10.6,-8.25) 75(10.6,-7.75) 76(10.6,-7.25) 77(10.6,-6.75) 78(10.6,-6.25) 79(10.6,-5.75) 80(10.6,-5.25) 81(10.6,-4.75) 82(10.6,-4.25) 83(10.6,-3.75) 84(10.6,-3.25) 85(10.6,-2.75) 86(10.6,-2.25) 87(10.6,-1.75) 88(10.6,-1.25) 89(10.6,-0.75) 90(10.6,-0.25) 91(10.6,0.25) 92(10.6,0.75) 93(10.6,1.25) 94(10.6,1.75) 95(10.6,2.25) 96(10.6,2.75) 97(10.6,3.25) 98(10.6,3.75) 99(10.6,4.25) 100(10.6,4.75) 101(10.6,5.25) 102(10.6,5.75) 103(10.6,6.25) 104(10.6,6.75) 105(10.6,7.25) 106(10.6,7.75) 107(10.6,8.25) 108(10.6,8.75)
  oval 0.3x2.1 smd: 37(-8.75,-10.6) 38(-8.25,-10.6) 39(-7.75,-10.6) 40(-7.25,-10.6) 41(-6.75,-10.6) 42(-6.25,-10.6) 43(-5.75,-10.6) 44(-5.25,-10.6) 45(-4.75,-10.6) 46(-4.25,-10.6) 47(-3.75,-10.6) 48(-3.25,-10.6) 49(-2.75,-10.6) 50(-2.25,-10.6) 51(-1.75,-10.6) 52(-1.25,-10.6) 53(-0.75,-10.6) 54(-0.25,-10.6) 55(0.25,-10.6) 56(0.75,-10.6) 57(1.25,-10.6) 58(1.75,-10.6) 59(2.25,-10.6) 60(2.75,-10.6) 61(3.25,-10.6) 62(3.75,-10.6) 63(4.25,-10.6) 64(4.75,-10.6) 65(5.25,-10.6) 66(5.75,-10.6) 67(6.25,-10.6) 68(6.75,-10.6) 69(7.25,-10.6) 70(7.75,-10.6) 71(8.25,-10.6) 72(8.75,-10.6) 109(8.75,10.6) 110(8.25,10.6) 111(7.75,10.6) 112(7.25,10.6) 113(6.75,10.6) 114(6.25,10.6) 115(5.75,10.6) 116(5.25,10.6) 117(4.75,10.6) 118(4.25,10.6) 119(3.75,10.6) 120(3.25,10.6) 121(2.75,10.6) 122(2.25,10.6) 123(1.75,10.6) 124(1.25,10.6) 125(0.75,10.6) 126(0.25,10.6) 127(-0.25,10.6) 128(-0.75,10.6) 129(-1.25,10.6) 130(-1.75,10.6) 131(-2.25,10.6) 132(-2.75,10.6) 133(-3.25,10.6) 134(-3.75,10.6) 135(-4.25,10.6) 136(-4.75,10.6) 137(-5.25,10.6) 138(-5.75,10.6) 139(-6.25,10.6) 140(-6.75,10.6) 141(-7.25,10.6) 142(-7.75,10.6) 143(-8.25,10.6) 144(-8.75,10.6)
  silkscreen extent -10.72,-9.15 9.15,9.57, body extent -10,-10 10,10, height 1.6
MIC29152WU [mm]
  rect 0.93x2.9 smd: 1(-3.404,0) 2(-1.702,0) 3(0,0) 4(1.702,0) 5(3.404,0)
  rect 10.668x7.8 smd: 6(0,9.525)
  silkscreen extent -5.71,-1.91 5.71,13.97
PTS645 [mm]
  rect 1.55x1.33 smd: 1(-3.975,2.25)
  rect 1.55x1.3 smd: 2(3.975,2.25) 3(-3.975,-2.25) 4(3.975,-2.25)
  silkscreen extent -5.1,-3.2 5.1,3.2
SOIC127P570X175-16N [mm] "SOIC, 16-Leads, Body 9.90x4.20mm, Pitch 1.27mm, IPC Medium Density"
  oval 1x0.6 smd: 1(-2.95,4.445) 2(-2.95,3.175) 3(-2.95,1.905) 4(-2.95,0.635) 5(-2.95,-0.635) 6(-2.95,-1.905) 7(-2.95,-3.175) 8(-2.95,-4.445) 9(2.95,-4.445) 10(2.95,-3.175) 11(2.95,-1.905) 12(2.95,-0.635) 13(2.95,0.635) 14(2.95,1.905) 15(2.95,3.175) 16(2.95,4.445)
  silkscreen extent -3.08,-5 2.05,5.42, body extent -2.45,-5 2.45,5, height 1.75
TI-DBZ3_N [mm] "SOT23, 3-Leads, Body 2.92x1.3 mm, Pitch 0.95 mm, IPC Medium Density"
  rect 1.6x0.6 smd: 1(-0.9,0.95) 2(-0.9,-0.95) 3(0.9,0)
  silkscreen extent -1.02,-1.5 0.7,1.92, body extent -0.7,-1.52 0.7,1.52, height 1.12
TSOP65P640X120-24N [mm] "TSOP, 24-Leads, Body 7.80x4.40mm, Pitch 0.65mm, IPC Medium Density"
  oval 1.4x0.45 smd: 1(-2.95,3.575) 2(-2.95,2.925) 3(-2.95,2.275) 4(-2.95,1.625) 5(-2.95,0.975) 6(-2.95,0.325) 7(-2.95,-0.325) 8(-2.95,-0.975) 9(-2.95,-1.625) 10(-2.95,-2.275) 11(-2.95,-2.925) 12(-2.95,-3.575) 13(2.95,-3.575) 14(2.95,-2.925) 15(2.95,-2.275) 16(2.95,-1.625) 17(2.95,-0.975) 18(2.95,-0.325) 19(2.95,0.325) 20(2.95,0.975) 21(2.95,1.625) 22(2.95,2.275) 23(2.95,2.925) 24(2.95,3.575)
  silkscreen extent -3.07,-3.95 1.85,4.47, body extent -2.25,-3.95 2.25,3.95, height 1.2
ZEN056V130A24L [mm]
  rect 0.56x2.21 smd: 1(-1.27,0)
  rect 0.56x0.94 smd: 2(1.27,0.635) 3(1.27,-0.635)
  silkscreen extent -2,-2 2,2

## Part data
BP1 BP2 BP3 BP4: "Digi-Key Part Number CKN9112CT-ND"
C1 C3 C4 C5 C7 C8 C9 C10 C11 C12 C13 C14 C15 C16 C17 C18 C19 C22 C25 C26 C27 C28 C29 C34 C35 C37 C38 C41 C43 C45 C47 C48 C49 C100 C119 C120 C121 C123 C124 C125 C126 C127 C128 C129 C130 C131 C132 C133 C134 C135: "Polarized Capacitor (Surface Mount)"
C2: "Not sure if this one should be 0805?"
C33 C36 C40 C42: library part "0805 MLCC - X7R, 10%", "0805 MLCC - X7R, 10%"
D2: library part LED2, "Typical RED, GREEN, YELLOW, AMBER GaAs LED NO IDEA WHAT IS GOING ON WITH THE FOOTRPINTS"
D3: library part LED2, "Typical RED, GREEN, YELLOW, AMBER GaAs LED. NO IDEA WHAT IS GOING ON WITH THE FOOTPRINTS"
D4: library part LED2, "So I downloaded the footrpint off the net, but it seems to be dodgy, but for some reason the dims don't make sense"
D5: library part LED2, "Typical RED, GREEN, YELLOW, AMBER GaAs LED"
D6: "Precision Micropower Shunt Voltage Reference, 0.1% accuracy, 3 V, 15 ppm / degC, 15 mA, -40 to 85 degC, 3-pin SOT-23 (DBZ), Green (RoHS & no Sb/Br)"
FTDI: "Header, 6-Pin"
J1: "Digi-Key Part Number CP-002AHPJCT-ND"
J2: "Header, 10-Pin, Dual row"
J13: "Receptacle Assembly, 9 Position, Right Angle"
J14 J15 J18 J19: "Header, 20-Pin, Dual row"
J17 J20: "Header, 4-Pin"
J30: library part "Header 3", "Header, 3-Pin"
JP1-1 JP1-2 JP1-3 JP1-4 JP1-5 JP1-6 JP3 JP11 JP22 JP23: "Header, 2-Pin"
JP7: "Header, 3-Pin, fix symbol later"
JP17 JP18 JP19 JP20: "Header, 3-Pin"
L1 L2 L3: "DigiKey: 587-1691-1-ND"
MCU: library part ATSAM3X8E, "ATSAM3X8EA-AU ARM CORTEX M3 Microcontroller"
MN1: library part ZEN0656V130A, "Digi-key number: ZEN056V130A24LSCT-ND"
MN2: "Digikey number: 490-5053-ND"
MN3: "Mircel's 1.5A LDO TO263-5. Digikey Number: 576-3367-5-ND"
MN12: "Digikey Number: AT24C512C-SSHD-TCT-ND"
MN14: "Digikey Number: MAX3232CSE+-ND"
MN16: "Digikey Number: ADM3312EARUZ-ND"
MN17: "3.3V CAN Transceiver with Sleep Mode, 6 mA, -40 to Digi-Key Number 296-27991-1-ND"
MN18: "Digi-Key Number 296-27991-1-ND"
Q1: "Digikey Part Number: IRLML6401PBFCT-ND"
Q2 Q3: "DigiKey Part no: IRLML2502PBFCT-ND"
R1 R2 R3 R4 R5 R6 R7 R10 R11 R12 R13 R14 R16 R18 R19 R20 R21 R22 R23 R24 R25 R26 R27 R28 R29 R83 R119 R125 R126 R127 R128 R129 R130 R131 R132 R133 R134 R135 R136 R137 R138 R139 R140 R200 R201 R202 R203 R204 R205 R206: library part "0805 Thick Film Resistor 1%", "0805 Thick Film Resistor 1%"
R111 R112 R120 R121 R122 R123 R124 RR7-1 RR7-2 RR7-3 RR7-4: library part "0805 Thick Film Resistor 1%_1", "0805 Thick Film Resistor 1%"
Y1: library part "4-Pin Oscillator", "Digi-Key Part Number 887-1458-1-ND"
Y2: "Digikey Number: 535-9544-1-ND"

## Via types
v1: diameter 1.2, hole 0.6, Top Layer to Bottom Layer, 463 vias
v2: diameter 1.27, hole 0.6, Top Layer to Bottom Layer, 1 vias

## Nets (pads, with @x,y where several pads share a name; then routed paths per layer and width w, separated by ;. In a path a pad name is that pad's centre, name@x,y a point inside that pad or via, vN(x,y) a via of type N, cw(c..) or ccw(c..) an arc to the next point about the centre after c; other vN are vias at no path point)
+3V3: C3.1 C8.1 C10.1 C11.1 C100.1 C121.1 C125.1 C126.1 C127.1 C132.1 C133.1 C134.1 C135.1 D2.1 D3.1 D4.1 D5.1 FTDI.2 J2.1 J2.2 J14.39 J14.40 J15.39 J15.40 J18.39 J18.40 J19.39 J19.40 JP1-1.2 JP1-5.1 JP7.1 JP17.3 JP18.3 JP19.3 JP20.3 L1.1 L2.1 MN3.4 MN12.8 MN14.16 MN16.3 MN17.3 MN18.3 R3.2 R14.2 R18.2 R19.2 R20.2 R21.2 R22.2 R83.2 R111.2 R112.2 R125.2 R132.2 R200.2 R201.2 R202.2 R203.2 R205.2 RR7-1.1 RR7-2.1 RR7-3.1 RR7-4.1 | length 107.8
  Top Layer w0.2: v1(33.6,111.3) D4.1@33.6,113 ; R22.2@35.881,30.03 R20.2@35.881,33.28 R21.2@35.881,36.28 R19.2@35.881,39.28 R18.2@35.881,42.28 ; v1@46.4,45.7 46.65,45.95 C8.1@46.65,47.1 ; MN12.8@49.476,103.555 49.476,104.776 49.7,105 49.7,106.049 C100.1@49.731,106.08 49.731,107.031 49.9,107.2 49.9,108.699 JP7.1@50.281,109.08 ; v1@49.476,104.8 v1(49.5,104.8) ; v1(51.8,96.6) 51.8,96.2 52,96 R83.2@52,95.1 ; D5.1@58.5,56.7 v1(58.5,58.4) ; v1(61.9,58.4) D2.1@61.9,59.9 ; v1(71.5,47.9) R14.2@71.5,50 ; v1(79.3,51) L2.1@79.3,52.7 ; JP1-1.2@82.171,55.53 82.2,55.559 L1.1@82.2,60.1 ; RR7-4.1@86.15,104.8 86.1,104.85 86.1,106.2 v1@86.8,106.2 ; v1(88.4,111.8) 88.8,111.8 89.2,111.4 89.2,110.2 RR7-3.1@89.25,110.25 ; JP17.3@92.8,104.96 92.8,104.1 94.257,102.643 RR7-1.1@94.257,95.33 95.27,95.33 95.5,95.1 95.5,93.8 96.249,93.051 D3.1@96.249,91.774 ; JP1-5.1@93.631,55.53 93.631,54.631 92.831,53.831 92.831,51.4 93.881,50.35 C3.1@93.881,49.28 ; R200.2@95.1,37.8 v1(95.1,39.3) 95.131,39.331 R112.2@95.131,40.78 ; v1(97.6,38.7) 97.6,39.1 98,39.5 C121.1@98,40.8 ; C127.1@98.831,118 98.831,116.169 v1@98.9,116.1 ; R203.2@99.6,35.5 99.6,37.6 99.98,37.98 MN14.16@100.75,37.98 ; v1(100.631,48.831) R111.2@100.631,50.28 ; MN17.3@101.266,76.18 v1(101.266,71.8) 101.266,70.395 C133.1@101.381,70.28 101.381,64.881 R132.2@101.3,64.8 ; v1(102.3,91) 102.3,92.277 R202.2@102.432,92.409 ; C125.1@102.5,112.6 C126.1@102.5,115.5 ; R205.2@104.8,32.9 v1(104.8,35) ; C135.1@106.05,50.3 C134.1@106.05,53.2 ; v1(107.5,59.1) 107.965,58.635 MN18.3@109.15,58.635 ; v1(107.5,81.1) R125.2@107.5,83.4
  Top Layer w0.25: MN16.3@99.125,109.1 v1@101.2,109.1
  Top Layer w1.25: C11.1@27.881,59.78 27.881,58.419 v1(27.9,58.4) ; v1(34.7,55.6) 34.7,56.95 R3.2@34.75,57 ; v1(34.906,61.78) MN3.4@34.906,65.078 ; C10.1@40.881,58.78 v1(40.881,60.28)
  other v1: 35.881,34.78 99.6,37.3 46.6,45.7 106.05,51.75 86.4,106.2 101.2,109.2 102.5,114 99,116.3
+5V: C2.1 J30.3 JP17.1 JP18.1 JP19.1 JP20.1 MN2.3 MN3.2 Q1.2 R4.2 R27.2 | length 257.8
  Top Layer w0.2: v1(31.406,61.78) 31.431,61.755 31.431,52.769 v1(32.2,52) ; v1@39.8,37.1 39.8,41.173 40,41.373 v1(40,50.2) ; JP19.1@118.94,86.9 118.94,89.267 119.3,89.627 119.3,90.733 119.1,90.933 v1@119.1,109.4
  Top Layer w0.75: v1(28.2,109.1) 28.8,109.7 28.8,118.861 JP18.1@28.631,119.03 ; v1(34.3,108.8) 34.181,108.681 34.181,86.755 MN2.3@35.406,85.53 ; 55.1,92.3 55.2,92.4 R27.2@55.2,95.3
  Top Layer w1.25: v1(31.406,61.78) MN3.2@31.406,64.982 ; MN3.2@31.454,65.03 v1(31.454,69.546) ; v1@39.75,86.25 40.47,85.53 C2.1@41.406,85.53 42.57,85.53 43.249,84.851 43.249,75.648 Q1.2@43.081,75.48 43.831,75.48 44.131,75.78 R4.2@45.131,75.78
  Bottom Layer w0.2: v1(32.2,52) 37.327,52 38.527,50.8 39.6,50.8 v1@39.9,50.5 ; v1(40,37.3) 40.8,37.3 41.32,36.78 43.326,36.78 44.376,35.73 JP20.1@45.431,35.73 ; J30.3@44.156,108.86 46.296,111 67.573,111 68.533,110.04 JP17.1@92.8,110.04 92.94,109.9 100.627,109.9 100.827,110.1 101.573,110.1 101.773,109.9 102.027,109.9 102.227,109.7 108.427,109.7 108.827,110.1 109.846,110.1 110.686,109.26 111.634,109.26 112.539,110.165 114.474,110.165 115.239,109.4 v1(119.3,109.4)
  Bottom Layer w0.75: 28.8,108.9 28.84,108.86 J30.3@44.156,108.86 ; v1@34.293,93.2 34.298,93.205 41.172,93.205 42.277,92.1 42.312,92.135 46.649,92.135 47.614,93.1 v1(55.2,93.1) ; MN2.3@35.406,85.53 36.476,86.6 v1(39.6,86.6)
  Bottom Layer w1.25: v1(31.454,69.546) 35.714,69.546 36.523,70.355 37.496,70.355 38.441,71.3 38.45,71.3 38.45,75.201 40.049,76.8 v1(43.3,76.8)
  other v1: 34.2,93.4
CTS0: MN16.11 R123.2 R201.1 | length 12.3
  Top Layer w0.2: R201.1@96.737,98.251 96.737,99.612 97.7,100.575 97.7,103.6 98.055,103.955 MN16.11@99.235,103.955 MN16.11@99.36,103.83 ; R123.2@99.881,98.23 v1(99.881,99.681)
  Bottom Layer w0.2: v1(96.7,99.8) 99.762,99.8 v1(99.881,99.681)
DBGACK: J2.19
DBGRQ: J2.17
EARTH: J13.10 J13.11
FWUP: BP3.3 BP3.4 MCU.53 R23.1 | length 47.2
  Top Layer w0.2: MCU.53@77.965,75.974 80.639,73.3 80.773,73.3 81.425,72.648 81.425,70.71 81.7,70.435 81.7,65.501 81.8,65.401 81.8,64.7 81.45,64.35 81.45,61.149 81.15,60.849 81.15,58 81.173,58 81.7,57.473 81.7,56.727 81.173,56.2 81.15,56.2 81.15,55.994 81.121,55.965 81.121,55.096 80.498,54.473 BP3.3@80.498,43.595 ; BP3.4@80.463,35.68 BP3.4@80.498,35.645
  Top Layer w0.25: R23.1@77.081,35.68 v1(78.5,35.68) ; BP3.4@80.598,35.27 v1(80.598,37.2) BP3.3@80.598,43.22
  Bottom Layer w0.25: v1(78.5,35.68) 79.078,35.68 v1(80.598,37.2)
GND: BP1.1 BP1.2 BP2.1 BP2.2 BP3.1 BP3.2 BP4.1 BP4.2 C2.2 C3.2 C4.2 C5.2 C7.2 C8.2 C9.2 C10.2 C11.2 C12.2 C13.2 C14.2 C15.2 C16.2 C17.2 C18.2 C19.2 C25.2 C26.2 C27.2 C28.2 C29.2 C33.2 C34.2 C35.2 C36.2 C37.2 C38.2 C40.2 C41.2 C42.2 C43.2 C45.2 C47.2 C48.2 C100.2 C119.2 C121.2 C124.2 C125.2 C126.2 C132.2 C133.2 C134.2 C135.2 D6.2 FTDI.1 J2.4 J2.6 J2.8 J2.10 J2.12 J2.14 J2.16 J2.18 J2.20 J13.5 J14.3 J14.4 J14.37 J14.38 J15.3 J15.4 J15.37 J15.38 J17.1 J17.4 J18.3 J18.4 J18.37 J18.38 J19.3 J19.4 J19.37 J19.38 J20.1 J20.4 JP3.2 JP11.2 MCU.12 MCU.33 MCU.44 MCU.54 MCU.58 MCU.106 MCU.126 MN2.4 MN2.5 MN2.6 MN3.3 MN3.6 MN12.2 MN12.3 MN12.4 MN12.7 MN14.15 MN17.2 MN18.2 Q2.2 Q3.2 R5.1 R6.1 R28.1 R29.1 R131.1 R138.1 R204.1 R206.1 Y1.2 Y1.4 | length 228.2
  Top Layer w0.2: C2.2@41.406,88.03 41.436,88 v1(43.1,88) ; C33.2@42.9,51.7 v1(42.9,53.2) ; C36.2@46.55,55.3 46.55,51.637 Y1.2@46.834,51.353 ; R28.1@46.65,44.1 46.7,44.05 v1(46.7,42.7) ; v1(46.7,64.4) 46.7,64.499 47.501,65.3 48,65.3 48.25,65.55 C19.2@48.25,66.75 ; Y1.4@49.034,49.653 49.034,47.216 C8.2@49.15,47.1 ; C17.2@49.95,69.75 49.95,68.15 v1(50.1,68) ; MN12.2@50.731,98.055 50.731,100.431 v1@51.13,100.83 ; MN12.7@50.746,103.555 50.746,100.954 v1@50.87,100.83 ; MN12.3@52.001,98.055 52.001,99.4 52.726,100.125 53.271,100.125 ; v1(52.2,107.4) 52.8,107.4 52.231,106.831 C100.2@52.231,106.08 ; C26.2@52.209,46.888 52.988,46.888 53.2,47.1 v1(53.2,48.4) ; MN12.4@53.271,98.055 53.271,100.1 ; C29.2@55.913,72.105 C27.2@55.913,77.947 ; D6.2@56.381,103.93 57.37,103.93 57.5,103.8 v1(57.5,102.811) 57.831,102.48 C16.2@57.831,101.155 C16.2@57.986,101 ; C41.2@59.4,69.6 59.4,66.65 C25.2@59.45,66.6 ; C47.2@61.176,101 C47.2@61.331,101.155 62.055,101.155 62.4,101.5 v1(62.4,102.3) ; MCU.12@61.207,78.803 63.5,81.096 63.3,81.296 v1(63.3,82.1) ; MCU.126@63.681,91.672 65.2,90.154 65,89.953 v1(65,89.6) ; v1(66.3,47.5) C48.2@66.3,49 ; v1(67.1,53.6) 67.1,54.65 67.2,54.75 Q3.2@67.15,54.8 ; MCU.33@68.631,71.378 v1(71.753,74.5) 71.753,74.447 72,74.2 73.375,74.2 MCU.44@74.783,72.792 ; MCU.106@73.015,96.975 74.1,98.06 v1(74.1,107) ; C4.2@76.5,55.9 76.5,54.4 v1(76.6,54.3) ; MCU.54@78.319,76.328 78.248,76.328 78.248,76.469 77.199,77.518 75.982,77.518 75.2,78.3 75.2,79.1 75.6,79.5 v1(78.1,79.5) 78.1,79.375 MCU.58@79.733,77.742 ; v1(79.3,47) C7.2@79.3,49.3 ; C18.2@82.75,71.75 82.7,71.8 82.8,71.9 82.8,73.2 82.9,73.3 83.4,73.3 84.3,72.4 v1(84.3,71.8) ; C5.2@82.9,49.4 C5.2@82.8,49.5 82.8,50.6 83.2,51 v1(84.9,51) 84.9,52.261 C12.2@84.881,52.28 ; C15.2@85.25,66.25 85.25,65.05 84.2,64 84.2,60.7 84.4,60.5 C9.2@85.25,60.5 85.3,60.45 v1(85.3,58.8) ; C38.2@86.75,75.75 86.891,75.609 C43.2@86.891,72.644 ; v1(91.3,50.8) 91.3,49.361 C3.2@91.381,49.28 ; C34.2@92.25,85 C35.2@92.25,81.75 C37.2@92.25,78.75 92.25,75.382 C45.2@92.332,75.3 ; C14.2@93.881,52.28 93.9,52.299 v1(93.9,53.6) ; R138.1@96.8,49.3 96.8,47.6 v1(97,47.4) 97,46.6 98,45.6 C121.2@98,43.3 ; C40.2@98.3,67.1 98.231,67.169 C42.2@98.231,69.972 98.231,71.482 100.1,73.351 100.1,76.076 MN17.2@99.996,76.18 ; MN14.15@100.75,39.25 100.8,39.2 101.6,39.2 101.801,38.999 101.801,36.101 v1(101.2,35.5) ; R131.1@101.6,83.6 101.6,89.1 R29.1@101.9,89.4 v1(103.9,89.4) ; C133.2@103.881,70.28 C132.2@103.881,73.28 ; C125.2@105,112.6 C126.2@105,115.5 ; C135.2@108.55,50.3 C134.2@108.55,53.2 ; MN18.2@109.15,57.365 111.535,57.365 111.8,57.1 J20.1@111.8,56.42 ; C119.2@110.95,36 111,35.95 R204.1@111,32.3 ; v1(112.4,50) C124.2@114,50 ; R206.1@114.3,32.3 v1@114.3,34.3
  Top Layer w0.25: BP4.1@60.581,35.73 BP4.2@60.581,43.68 ; BP2.1@68.744,35.645 v1(68.744,39.62) BP2.2@68.744,43.595 ; BP3.2@85.098,35.27 BP3.1@85.098,43.22 ; BP1.1@87.644,35.495 v1(87.644,39.47) BP1.2@87.644,43.445
  Top Layer w1.25: C11.2@30.381,59.78 30.4,59.761 v1(30.4,58.3) ; MN3.3@33.156,65.03 MN3.6@33.156,73.78 ; MN3.6@33.156,74.555 33.631,75.03 R5.1@33.631,80.53 ; v1(34.6,58.5) 34.6,59.749 R6.1@34.631,59.78 ; Q2.2@42.581,67.33 43.381,67.33 ; C10.2@43.381,58.78 v1(43.381,60.28) ; C13.2@43.381,64.78 43.381,67.33 ; JP3.2@45.131,67.74 44.721,67.33 43.381,67.33
  other v1: 114.3,34 111,34.2 85.098,39.87 60.581,40.08 49,48.3 108.55,51.8 46.58,53 59.3,68.1 98.2,68.6 29.156,71.78 31.156,71.78 34.656,71.78 36.906,71.78 32.9,71.8 103.881,71.8 55.9,73.6 29.156,73.78 31.156,73.78 32.906,73.78 34.656,73.78 36.906,73.78 86.891,74.3 29.156,75.53 32.9,75.7 34.6,75.7 31.156,75.78 36.906,75.78 32.9,77.5 29.156,77.53 31.156,77.53 34.656,77.53 36.906,77.53 92.2,83.7 53.3,99.1 50.6,100.9 104.9,114.1
JTAGSEL: MCU.46 R139.2 | length 8.1
  Top Layer w0.2: R139.2@74.25,66.75 74.25,66.787 74.9,67.437 74.9,68.364 76.4,69.864 76.4,70.561 76.3,70.661 76.3,71.738 76.4,71.838 76.4,72.59 MCU.46@75.49,73.499
NetC1_1: C1.1 MN1.3 MN2.1 | length 18.5
  Top Layer w0.75: MN1.3@41.886,100.415 42.385,100.415 42.9,99.9 42.9,96.286 C1.1@43.156,96.03
  Top Layer w1.25: v1(43.156,90.544) C1.1@43.156,96.03
  Bottom Layer w0.2: v1@43.17,90.53 v1@43.2,90.5
  Bottom Layer w1.25: MN2.1@35.406,90.53 v1@43.17,90.53
NetC1_2: C1.2 J1.3 MN1.2 MN2.2 | length 22
  Top Layer w0.75: J1.3@37.856,98.98 40.38,98.98 ; 40.6,98.98 41.721,98.98 MN1.2@41.886,99.145
  Top Layer w1.25: 40.38,98.98 40.4,99 40.4,92.28 v1(40.7,91.98)
  Bottom Layer w1.25: MN2.2@30.406,90.53 33.32,90.53 34.795,92.005 36.017,92.005 36.042,91.98 v1(40.7,91.98)
NetC4_1: C4.1 JP1-4.2 L1.2 R1.2 | length 22.9
  Top Layer w0.2: C4.1@76.5,58.4 v1(76.5,60.1) v1@76.5,60.3 ; v1(79.7,58.7) L1.2@79.7,60.1 ; v1@87.6,58.6 87.921,58.279 JP1-4.2@87.921,55.53 87.921,55.179 88.2,54.9 R1.2@88.2,52.1
  Bottom Layer w0.2: v1(76.5,60.1) 77.9,58.7 v1(79.7,58.7) 83.398,58.7 84.398,57.7 86.9,57.7 v1(87.9,58.7)
NetC5_1: C5.1 R1.1 | length 2.9
  Top Layer w0.2: C5.1@85.3,49.5 85.4,49.6 R1.1@88.2,49.6
NetC7_1: C7.1 JP1-6.2 L2.2 R2.2 | length 40.1
  Top Layer w0.2: v1(74.6,50.9) 74.6,60.427 74.4,60.627 74.4,61.373 74.927,61.9 75.6,61.9 75.8,62.1 76.7,62.1 v1(76.8,62.2) ; C7.1@76.8,49.3 v1(76.8,50.9) L2.2@76.8,52.7 ; R2.2@93.631,63.78 93.671,63.74 JP1-6.2@93.671,60.53
  Bottom Layer w0.2: v1(74.6,50.9) v1(76.8,50.9) ; v1@76.55,62.15 83.45,62.15 83.6,62.3 91.901,62.3 JP1-6.2@93.671,60.53
NetC9_1: C9.1 R2.1 | length 8.5
  Top Layer w0.2: C9.1@85.25,63 86.1,63 v1(86.7,63.6) ; v1(91.1,65.4) 91.1,63.811 R2.1@91.131,63.78
  Bottom Layer w0.2: v1(86.7,63.6) 89.4,63.6 90.7,64.9 90.7,65 v1(91.1,65.4)
NetC13_1: C13.1 Q2.1 R7.1 | length 5.9
  Top Layer w0.5: Q2.1@40.631,67.28 40.631,66.28 40.881,66.03 C13.1@40.881,64.78 ; C13.1@40.681,64.98 C13.1@40.881,64.78 ; R7.1@40.881,61.78 C13.1@40.881,64.78
NetC16_1: C16.1 D6.1 JP7.3 R27.1 | length 16.7
  Top Layer w0.2: JP7.3@54.4,109 JP7.3@54.94,109 55.11,108.83 55.236,108.704 55.236,105.924 55.4,105.76 55.4,104.473 55.281,104.354 55.281,103.506 55.6,103.187 55.6,100.886 C16.1@57.831,98.655 57.831,95.281 R27.1@57.75,95.2 ; 55.33,105.83 D6.1@56.381,105.83
NetC17_1: C17.1 JP1-3.2 L3.2 R16.2 | length 67.7
  Top Layer w0.2: JP1-3.2@49.95,75.5 C17.1@49.95,72.25 49.95,71.15 50.3,70.8 50.699,70.8 51,70.499 51,65.1 50.6,64.7 R16.2@50.6,61.2 50.6,59.9 51,59.5 51,55.962 51.2,55.762 v1(51.2,53.1) ; L3.2@80,68.95 80,67.9 80.4,67.5 80.749,67.5 81.2,67.049 81.2,64.666 81,64.466 81,63.645 81.01,63.635 81.01,62.15 80.75,61.89 80.75,57.15 v1(80.8,57.1)
  Bottom Layer w0.2: v1@51.1,52.9 52.8,54.6 69.573,54.6 72.073,57.1 v1(80.8,57.1)
NetC19_1: C19.1 R16.1 | length 3.1
  Top Layer w0.2: R16.1@48.1,61.2 48.1,64.1 C19.1@48.25,64.25
NetC48_1: C48.1 MCU.40 R28.2 | length 76.7
  Top Layer w0.2: v1(48.3,72.6) 48.3,72.2 48.8,71.7 48.8,69.53 48.6,69.33 48.6,68.199 49.175,67.624 49.175,62.6 49.15,62.575 49.15,57.675 48,56.525 v1(48,45.5) 48.7,45.5 49.15,45.05 R28.2@49.15,44.1 ; v1(63.6,46) 63.9,46.3 63.9,48.9 C48.1@63.8,49 ; v1(71.9,72.7) 71.9,72.847 MCU.40@73.369,71.378
  Bottom Layer w0.2: v1(48,45.5) 48.5,46 v1(63.6,46) ; v1(48.3,72.6) 51.027,72.6 51.927,73.5 52.927,74.5 59.273,74.5 61.073,72.7 v1(71.9,72.7)
NetC119_1: C119.1 MN14.2 | length 7.4
  Top Layer w0.2: MN14.2@106.65,39.25 105.45,39.25 105.2,39 105.2,36.7 105.9,36 C119.1@108.45,36
NetC120_1: C120.1 MN14.1 | length 4
  Top Layer w0.2: MN14.1@106.65,37.98 107.98,37.98 109,39 C120.1@110.2,39
NetC120_2: C120.2 MN14.3 | length 4
  Top Layer w0.2: MN14.3@106.65,40.52 108.12,40.52 109.1,41.5 C120.2@110.2,41.5
NetC123_1: C123.1 MN14.4 | length 5.4
  Top Layer w0.2: MN14.4@106.65,41.79 108.49,41.79 110.2,43.5 C123.1@110.2,44.6
NetC123_2: C123.2 MN14.5 | length 6.6
  Top Layer w0.2: MN14.5@106.65,43.06 107.44,43.06 108.9,44.52 108.9,46.9 109.1,47.1 C123.2@110.2,47.1
NetC124_1: C124.1 MN14.6 | length 14.7
  Top Layer w0.2: v1(105,44.8) 105.5,44.3 106.62,44.3 MN14.6@106.65,44.33 ; C124.1@114,47.5 114,44.8 v1(114.4,44.4)
  Bottom Layer w0.2: v1(105,44.8) 105.4,44.4 v1(114.4,44.4)
NetC127_2: C127.2 MN16.1 | length 10.9
  Top Layer w0.2: C127.2@96.331,118.33 C127.2@96.331,118 96.331,116.969 96.6,116.7 v1(96.6,114.8) ; v1@98.3,114.8 98.3,110.6 98.445,110.455 MN16.1@99.235,110.455
  Bottom Layer w0.2: v1@96.4,114.8 v1(96.6,114.8) v1(98.5,114.8)
NetC128_1: C128.1 MN16.6 | length 8.3
  Top Layer w0.2: 100.36,107.205 101.9,105.665 101.9,102.7 101.1,101.9 101.1,101.4 C128.1@100.8,101.1
  Top Layer w0.25: MN16.6@99.235,107.205 100.36,107.205
NetC128_2: C128.2 MN16.20 | length 9.2
  Top Layer w0.2: C128.2@103.6,100.9 103.6,101.7 102.7,102.6 102.7,106.8 103.755,107.855 MN16.20@105.135,107.855 MN16.20@105.161,107.881
NetC129_1: C129.1 MN16.2 | length 11.6
  Top Layer w0.2: MN16.2@99.235,109.805 100.505,109.805 100.9,110.2 100.9,118.2 101.2,118.5 C129.1@102.5,118.5
NetC129_2: C129.2 MN16.4 | length 18.4
  Top Layer w0.2: v1(97.6,116.6) 97.6,109.573 98.543,108.63 99.235,108.63 MN16.4@99.235,108.505 ; v1(104.9,117) 104.9,118.4 C129.2@105,118.5
  Bottom Layer w0.2: v1(97.6,116.6) 98.027,116.6 98.627,117.2 99.373,117.2 99.573,117 v1(104.9,117)
NetC130_1: C130.1 MN16.21 | length 16.9
  Top Layer w0.2: C130.1@105,121.5 105.2,121.3 106.4,121.3 107.8,119.9 107.8,118.927 108.3,118.427 108.3,111.234 107.7,110.634 107.7,110.11 106.095,108.505 MN16.21@105.135,108.505
NetC130_2: C130.2 MN16.23 | length 21.7
  Top Layer w0.2: C130.2@102.5,121.1 102.5,122.3 102.6,122.4 106.6,122.4 v1(107.9,121.1) ; MN16.23@105.135,109.805 106.305,109.805 107.9,111.4 107.9,118.262 107.4,118.762 107.4,119.4 v1@106.7,120.1
  Bottom Layer w0.2: v1(106.5,119.9) 107.7,121.1 v1(107.9,121.1)
NetC131_1: C131.1 MN16.24 | length 20.1
  Top Layer w0.2: C131.1@98.8,120.9 99.6,120.9 99.9,120.6 99.9,119.8 v1(99.9,112.4) v1@99.9,111.9 ; MN16.24@105.135,110.455 106.345,110.455 106.7,110.81 v1(106.7,112.2) v1@106.7,112.4
  Bottom Layer w0.2: v1(99.9,112.4) 106.5,112.4 v1(106.7,112.2)
NetC131_2: C131.2 MN16.22 | length 24.7
  Top Layer w0.2: v1(94.2,119.6) 94.2,120.4 94.7,120.9 C131.2@96.3,120.9 ; v1(103.75,119.756) 103.6,119.606 103.6,109.5 103.945,109.155 MN16.22@105.135,109.155
  Bottom Layer w0.2: v1(94.2,119.6) 103.594,119.6 v1(103.75,119.756)
NetD2_2: D2.2 R10.2 | length 3.6
  Top Layer w0.2: D2.2@59.4,59.9 R10.2@59.4,63.5